# Altium PCB PCB1.PcbDoc (part 1 of 4)
Units mil, origin at the board's own origin, x right, y up, seen from the top; angles counter-clockwise.
Board outline 3912 x 3804 mil, 4 copper layers (Top Layer, Layer 2, Layer 3, Bottom Layer), stack 23.756 mil thick; 248 components, 329 nets, 1182 pads, 457 vias.
Unrouted connection lines stored in the file: 4.
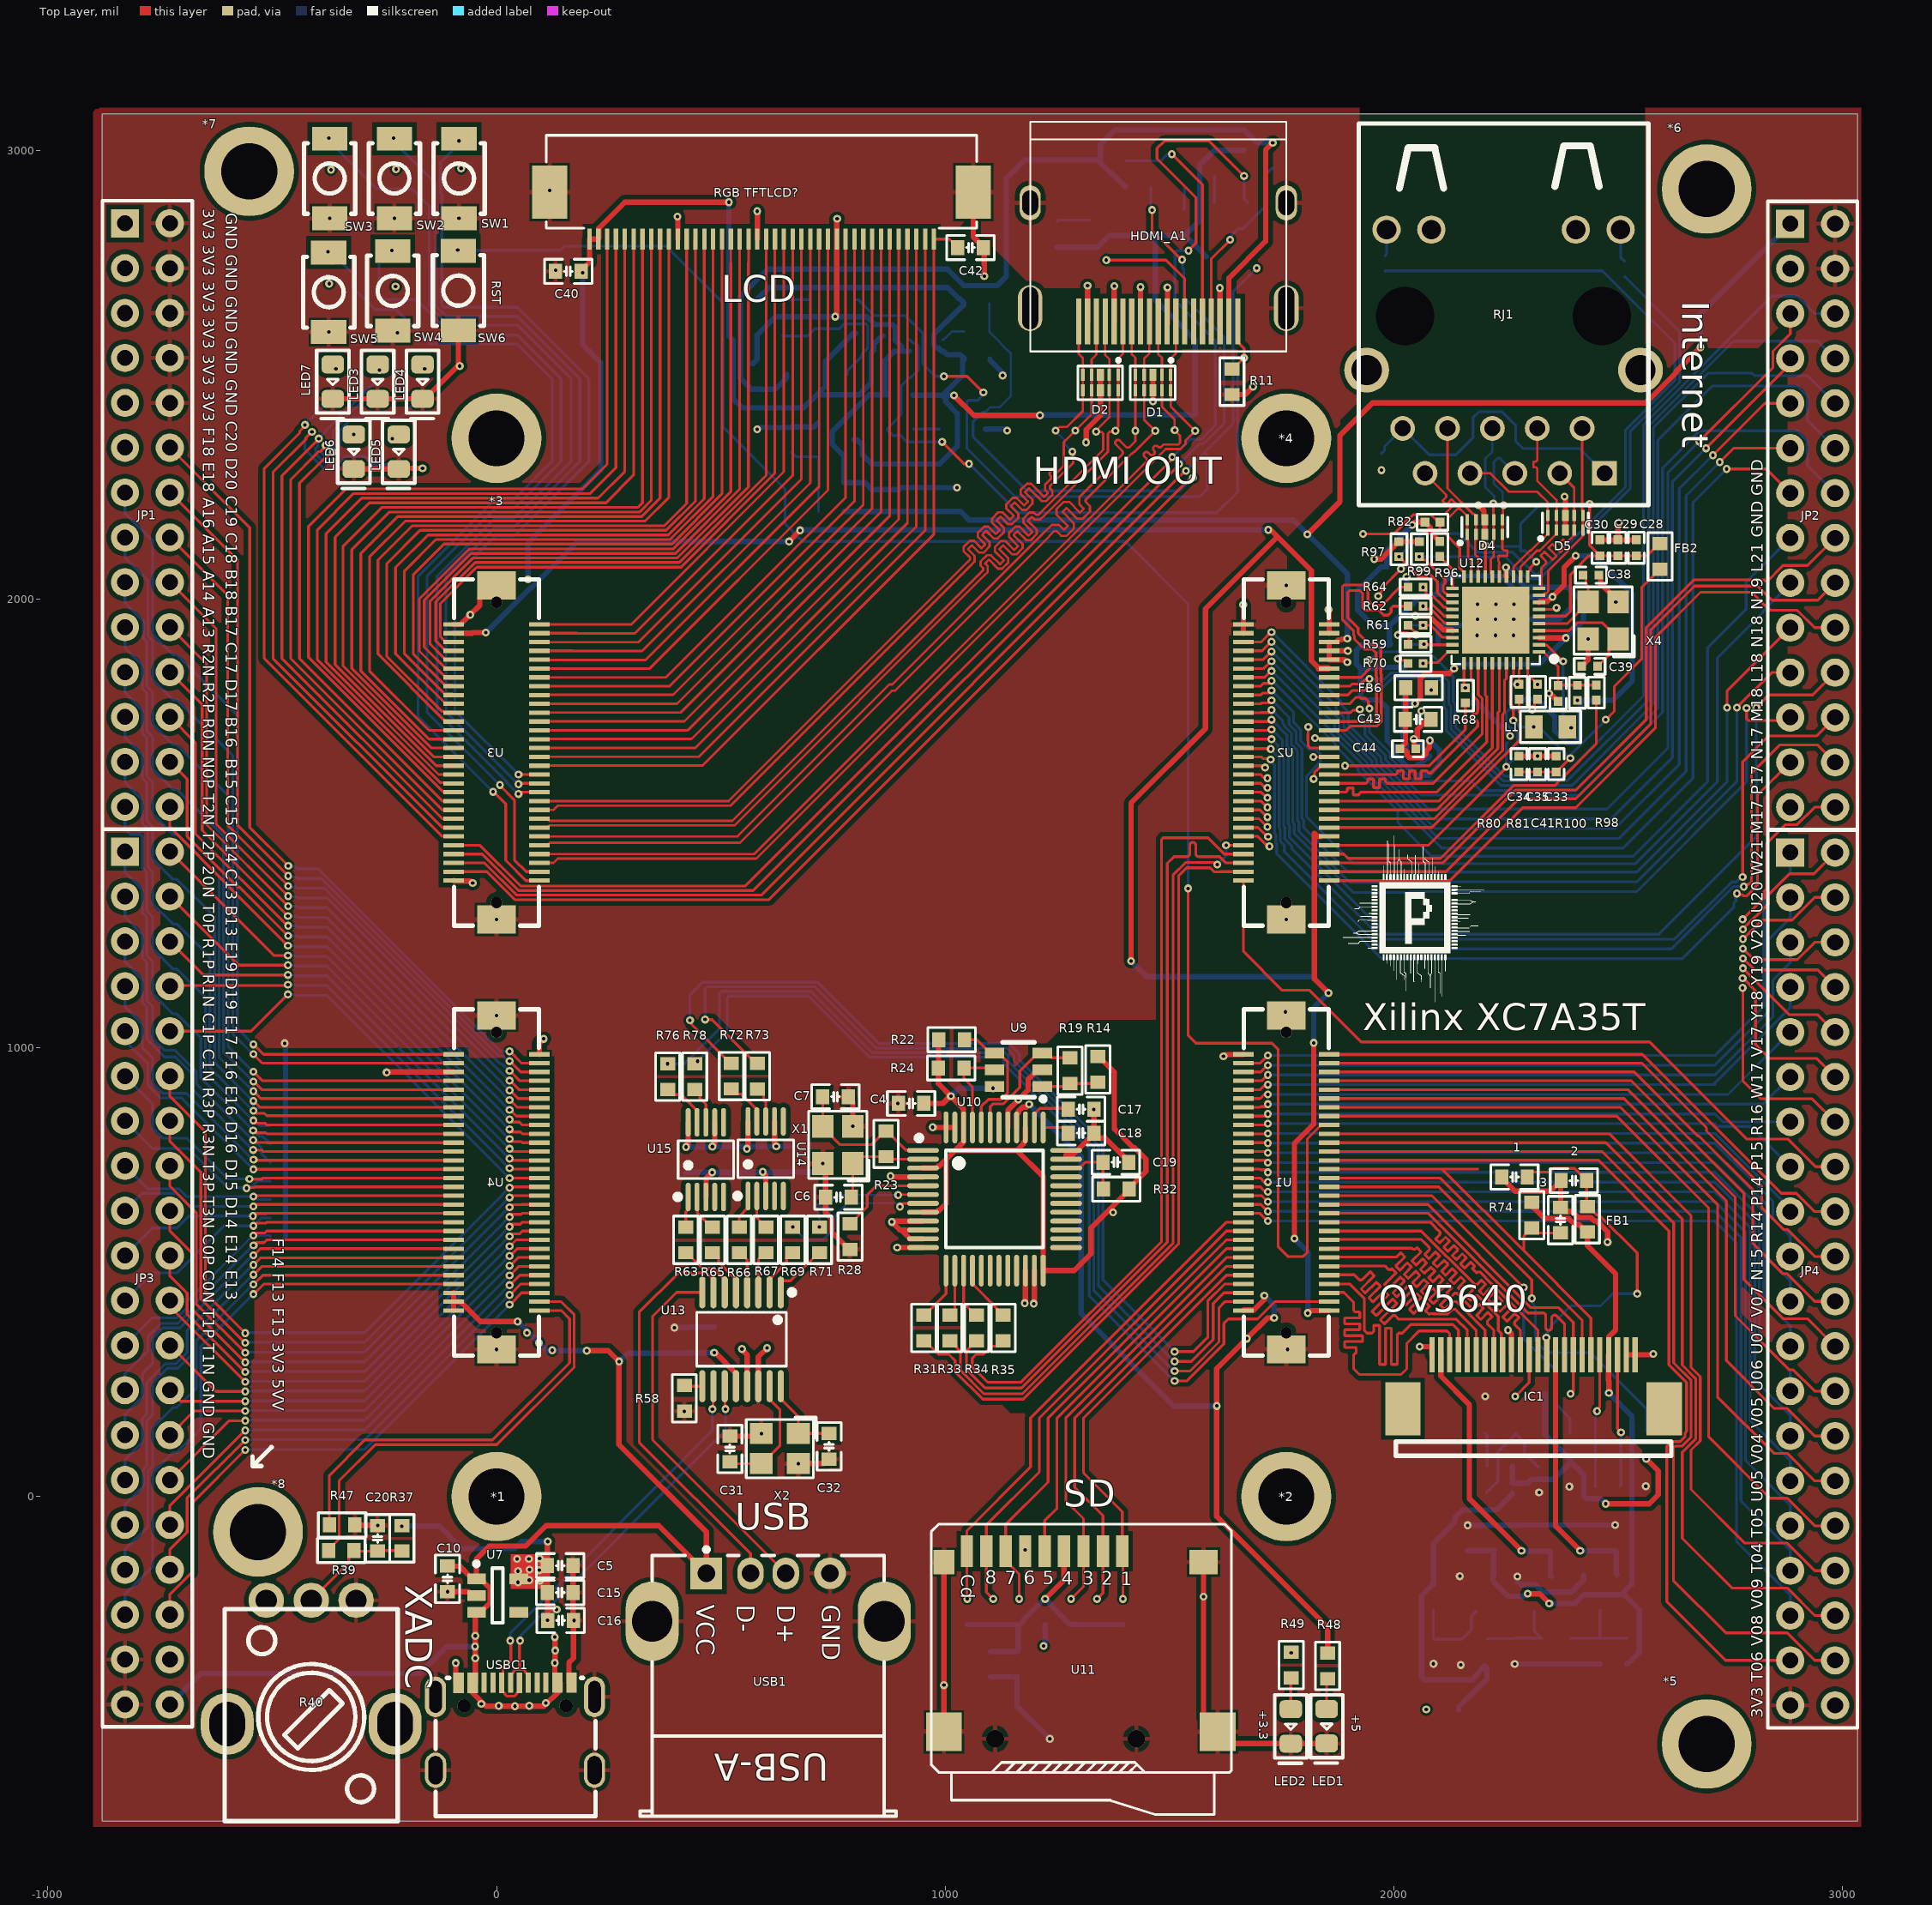
[diagram p0: Top Layer view]
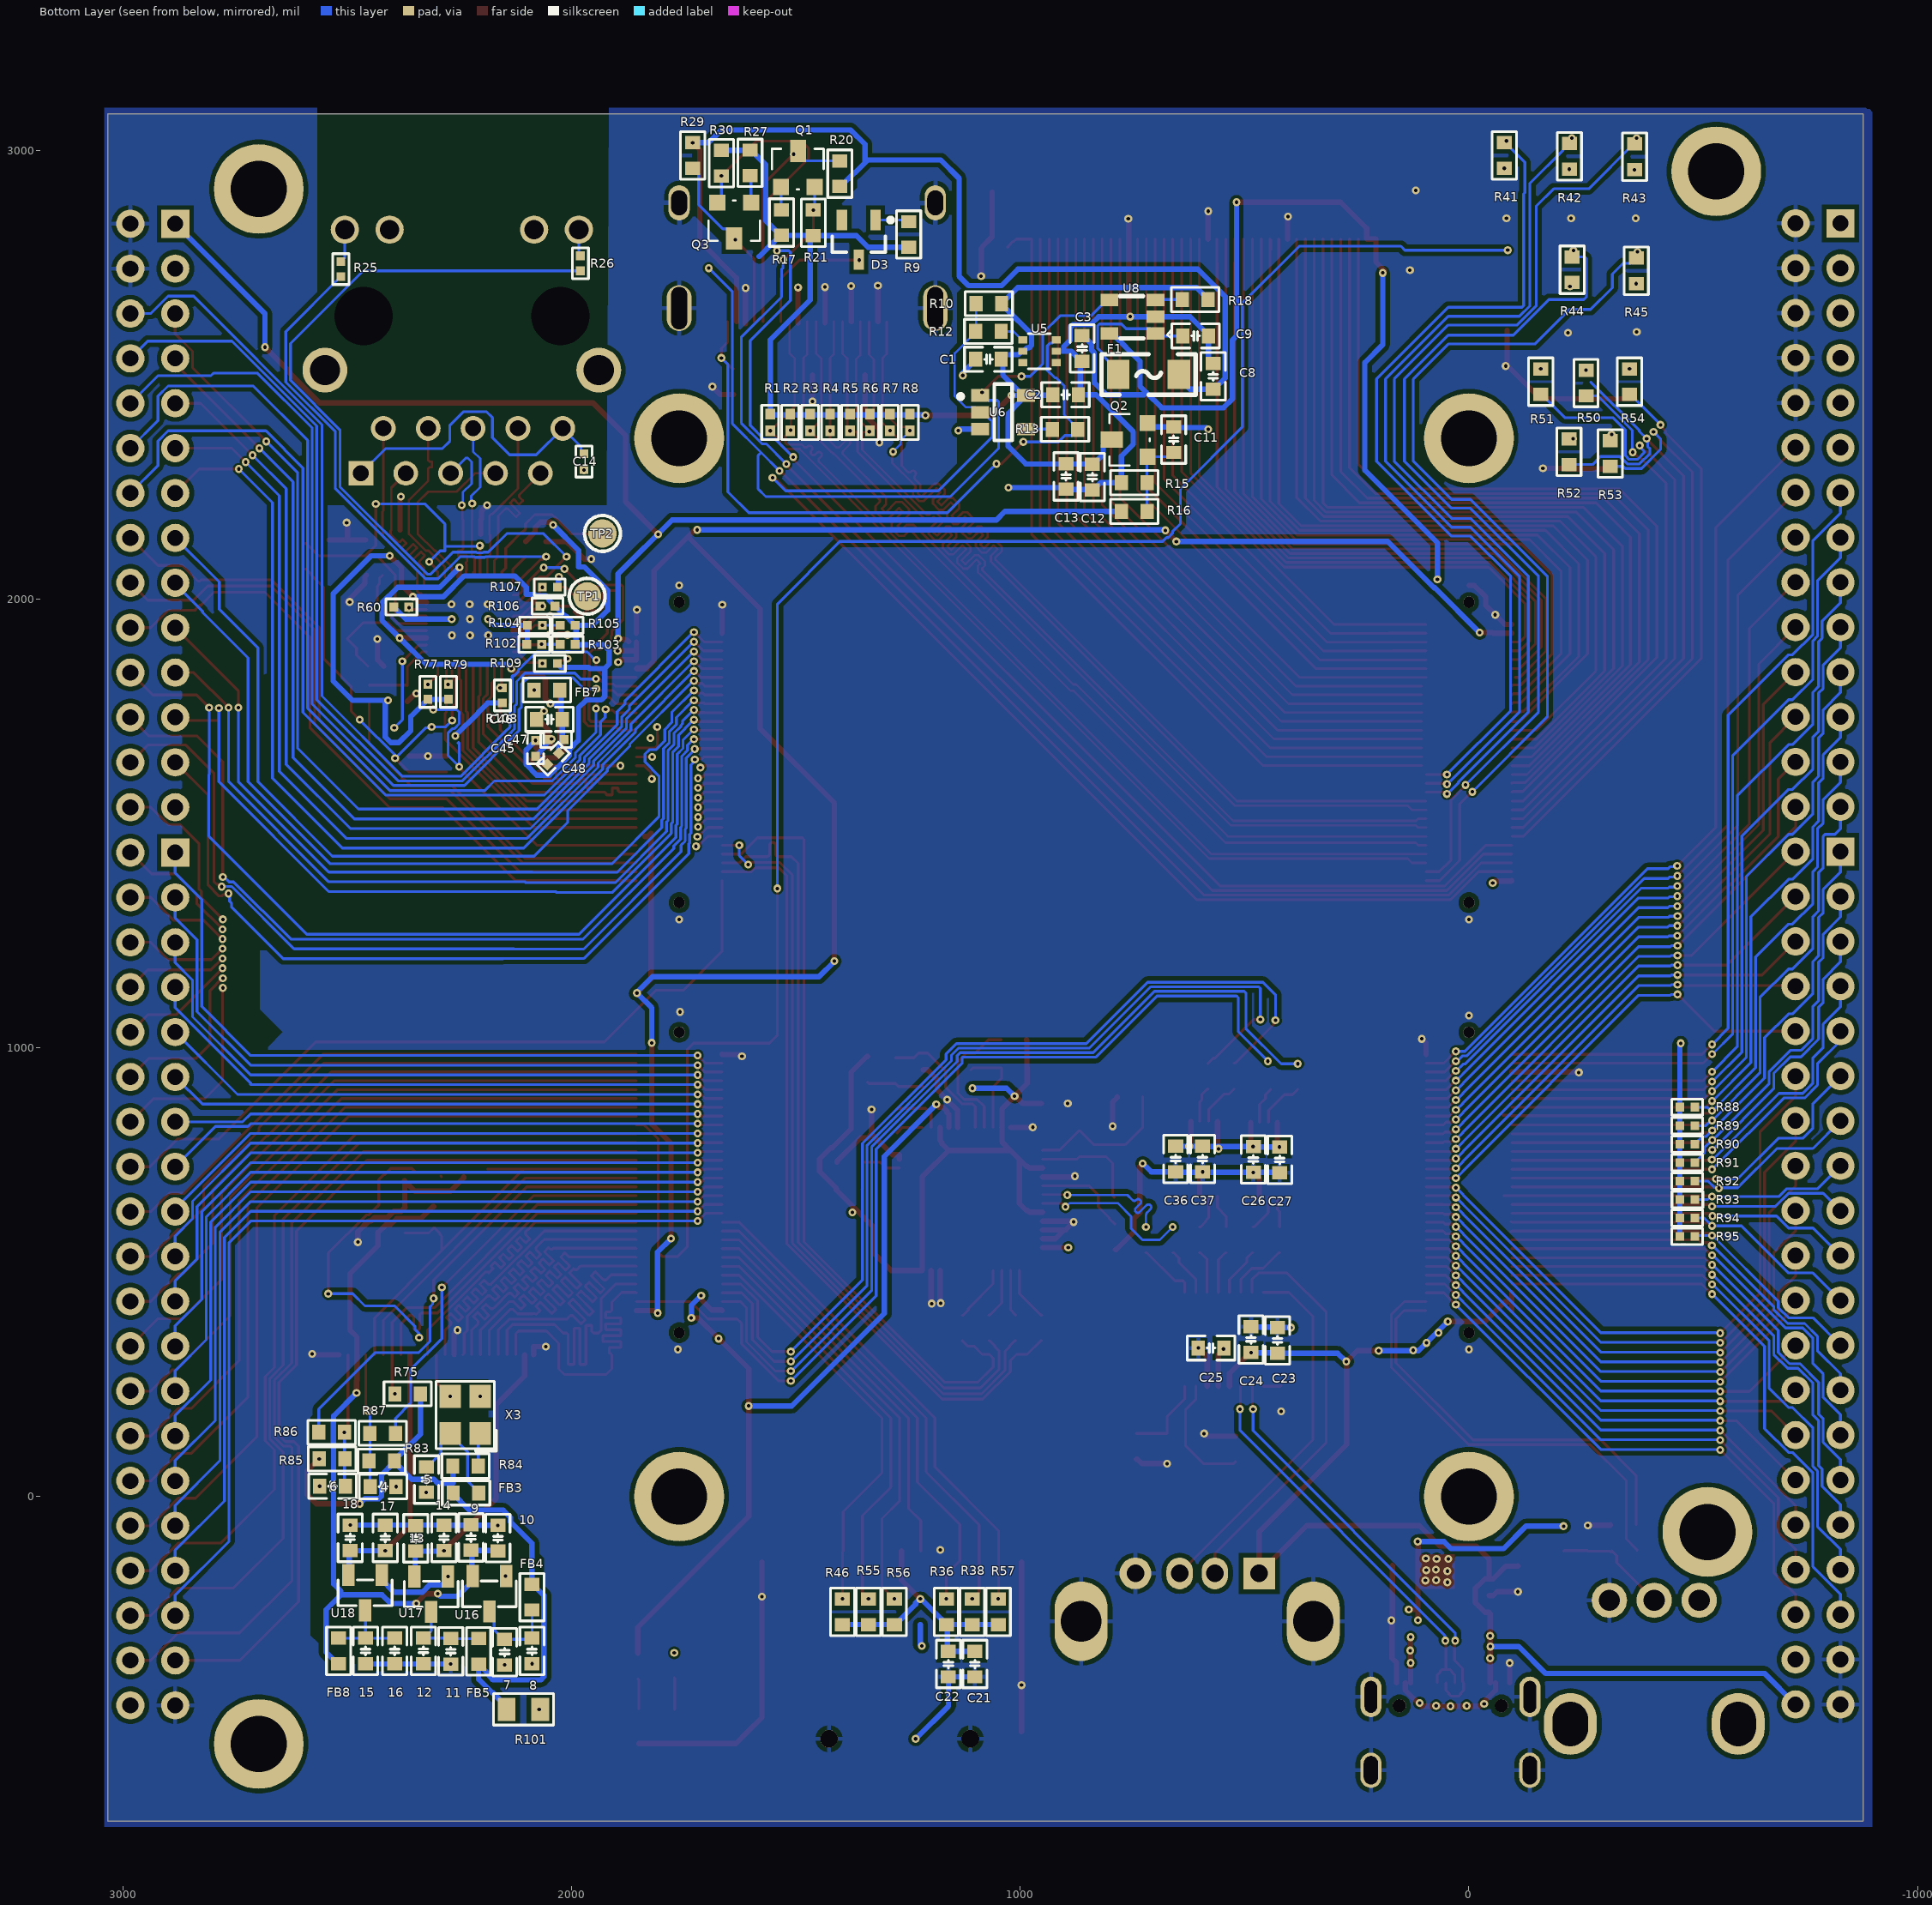
[diagram p1: Bottom Layer view, seen from below]
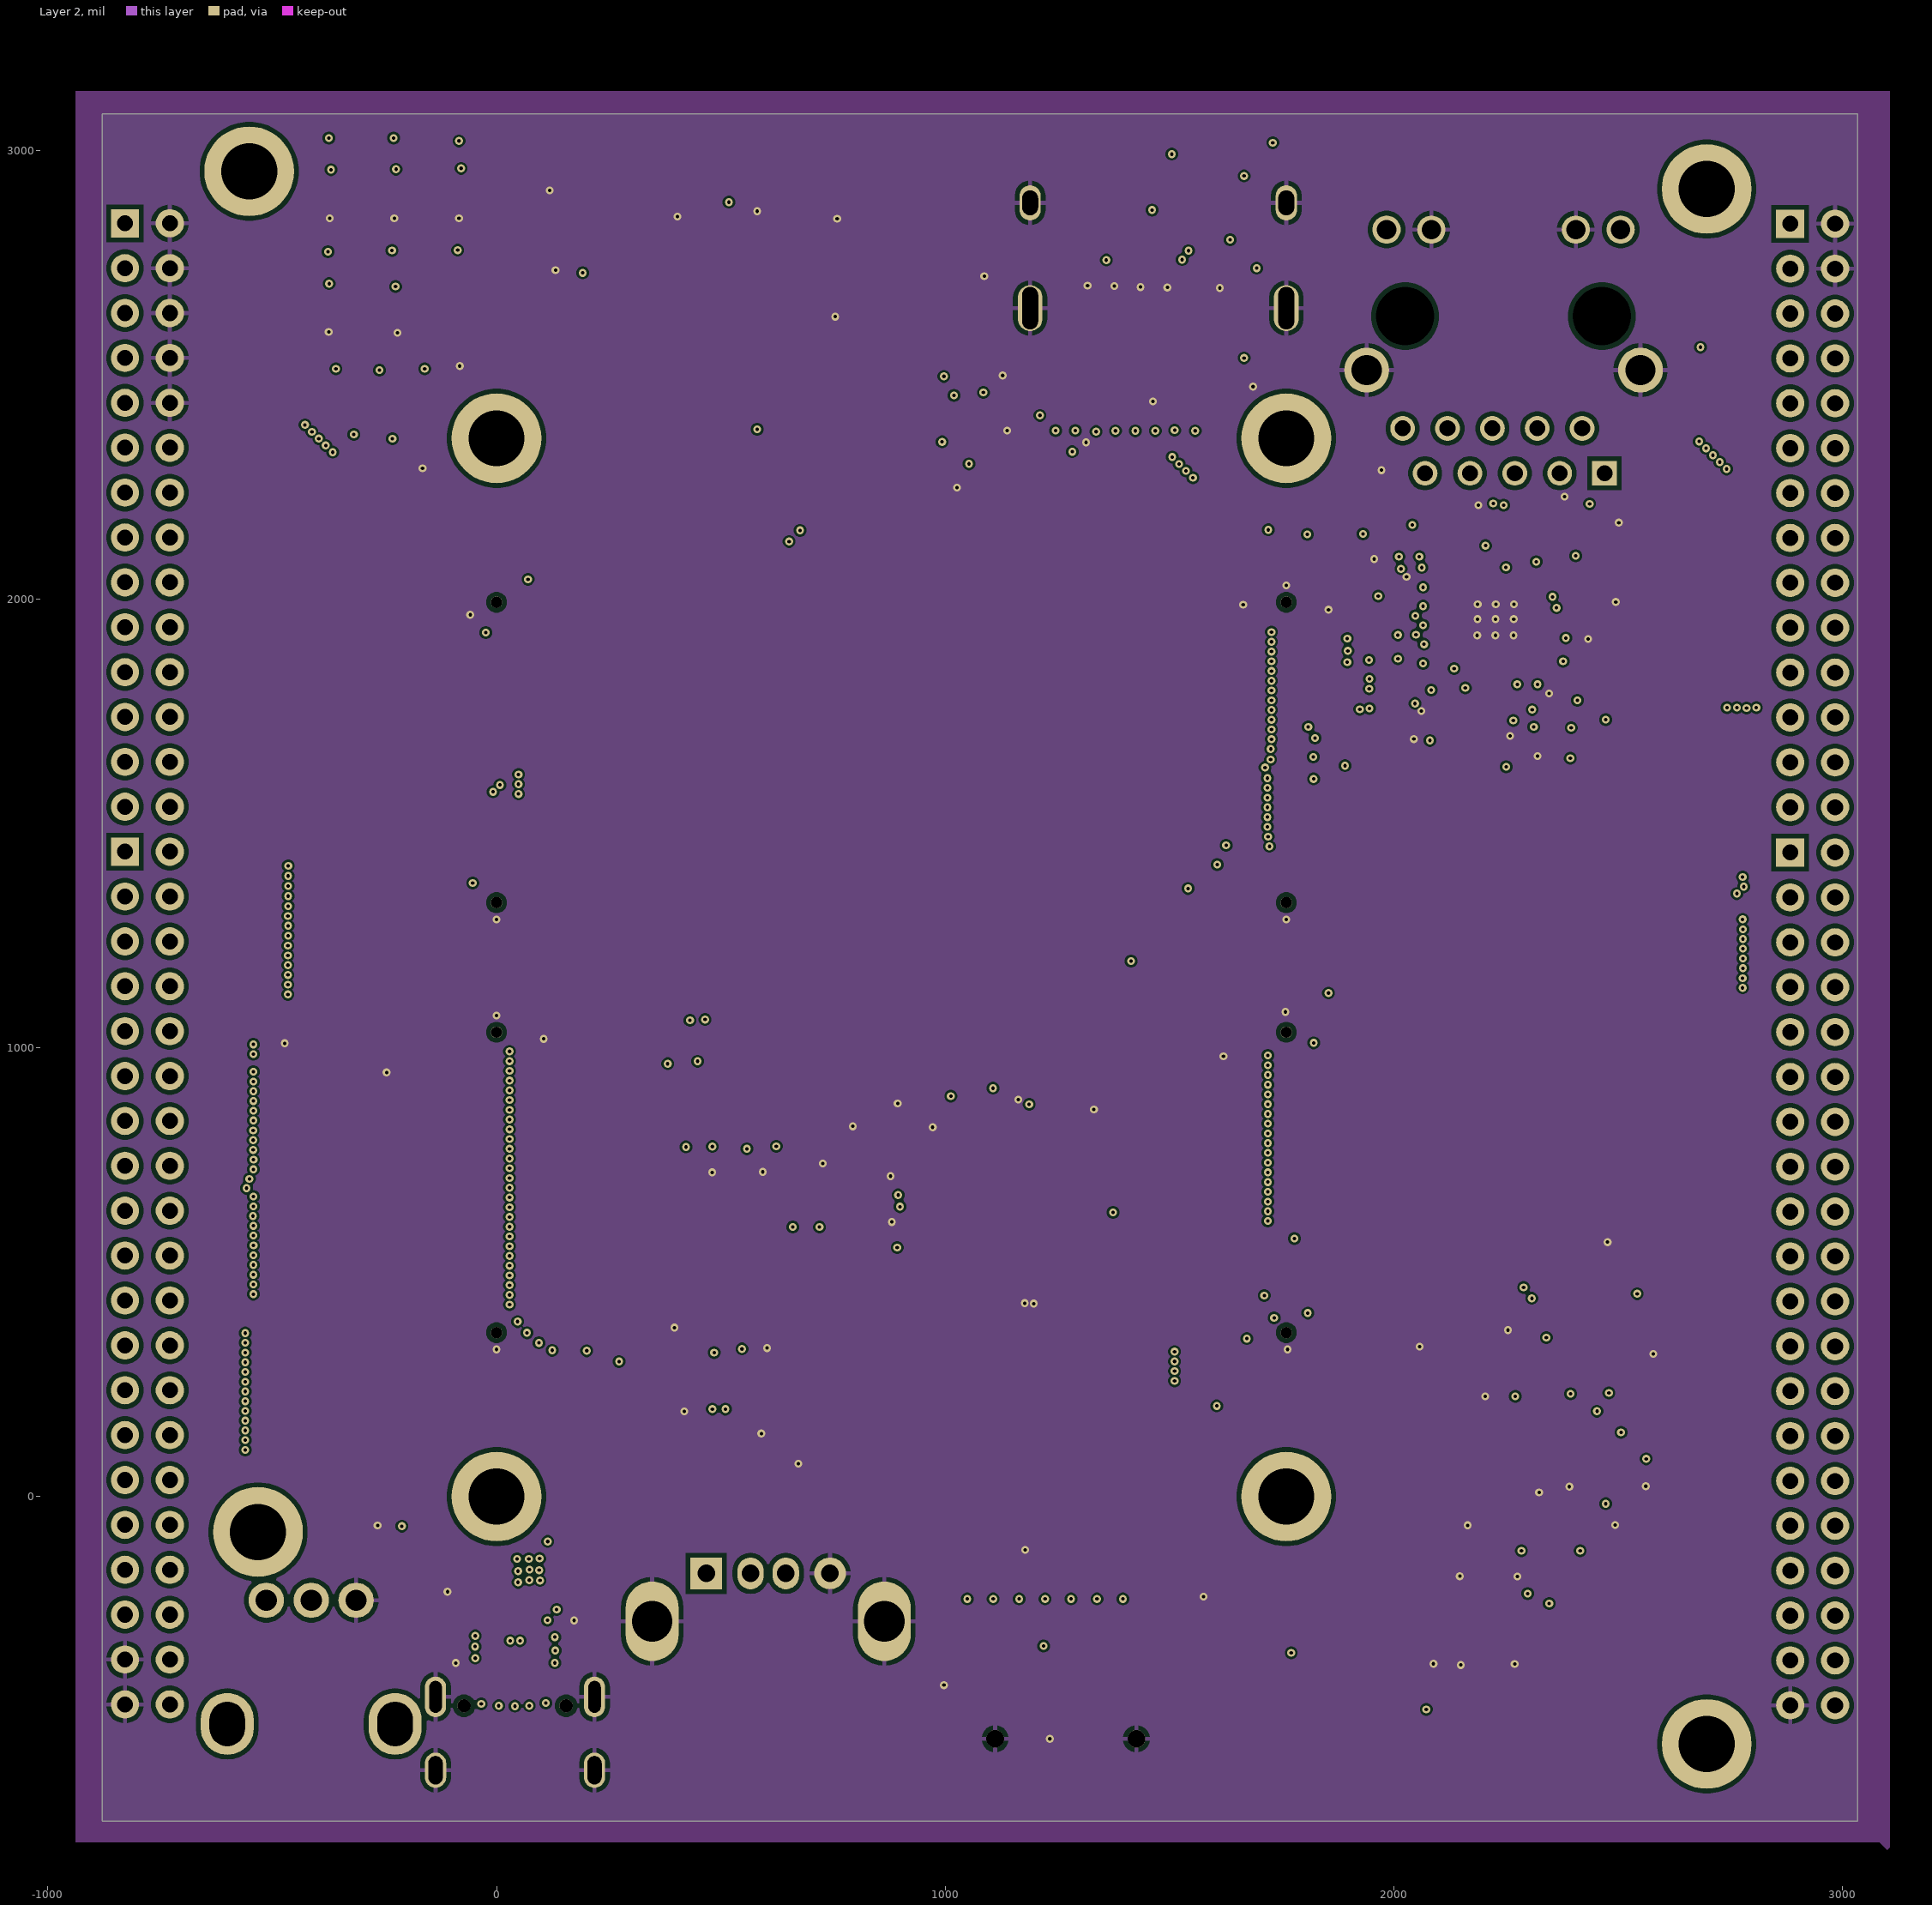
[diagram p2: Layer 2]
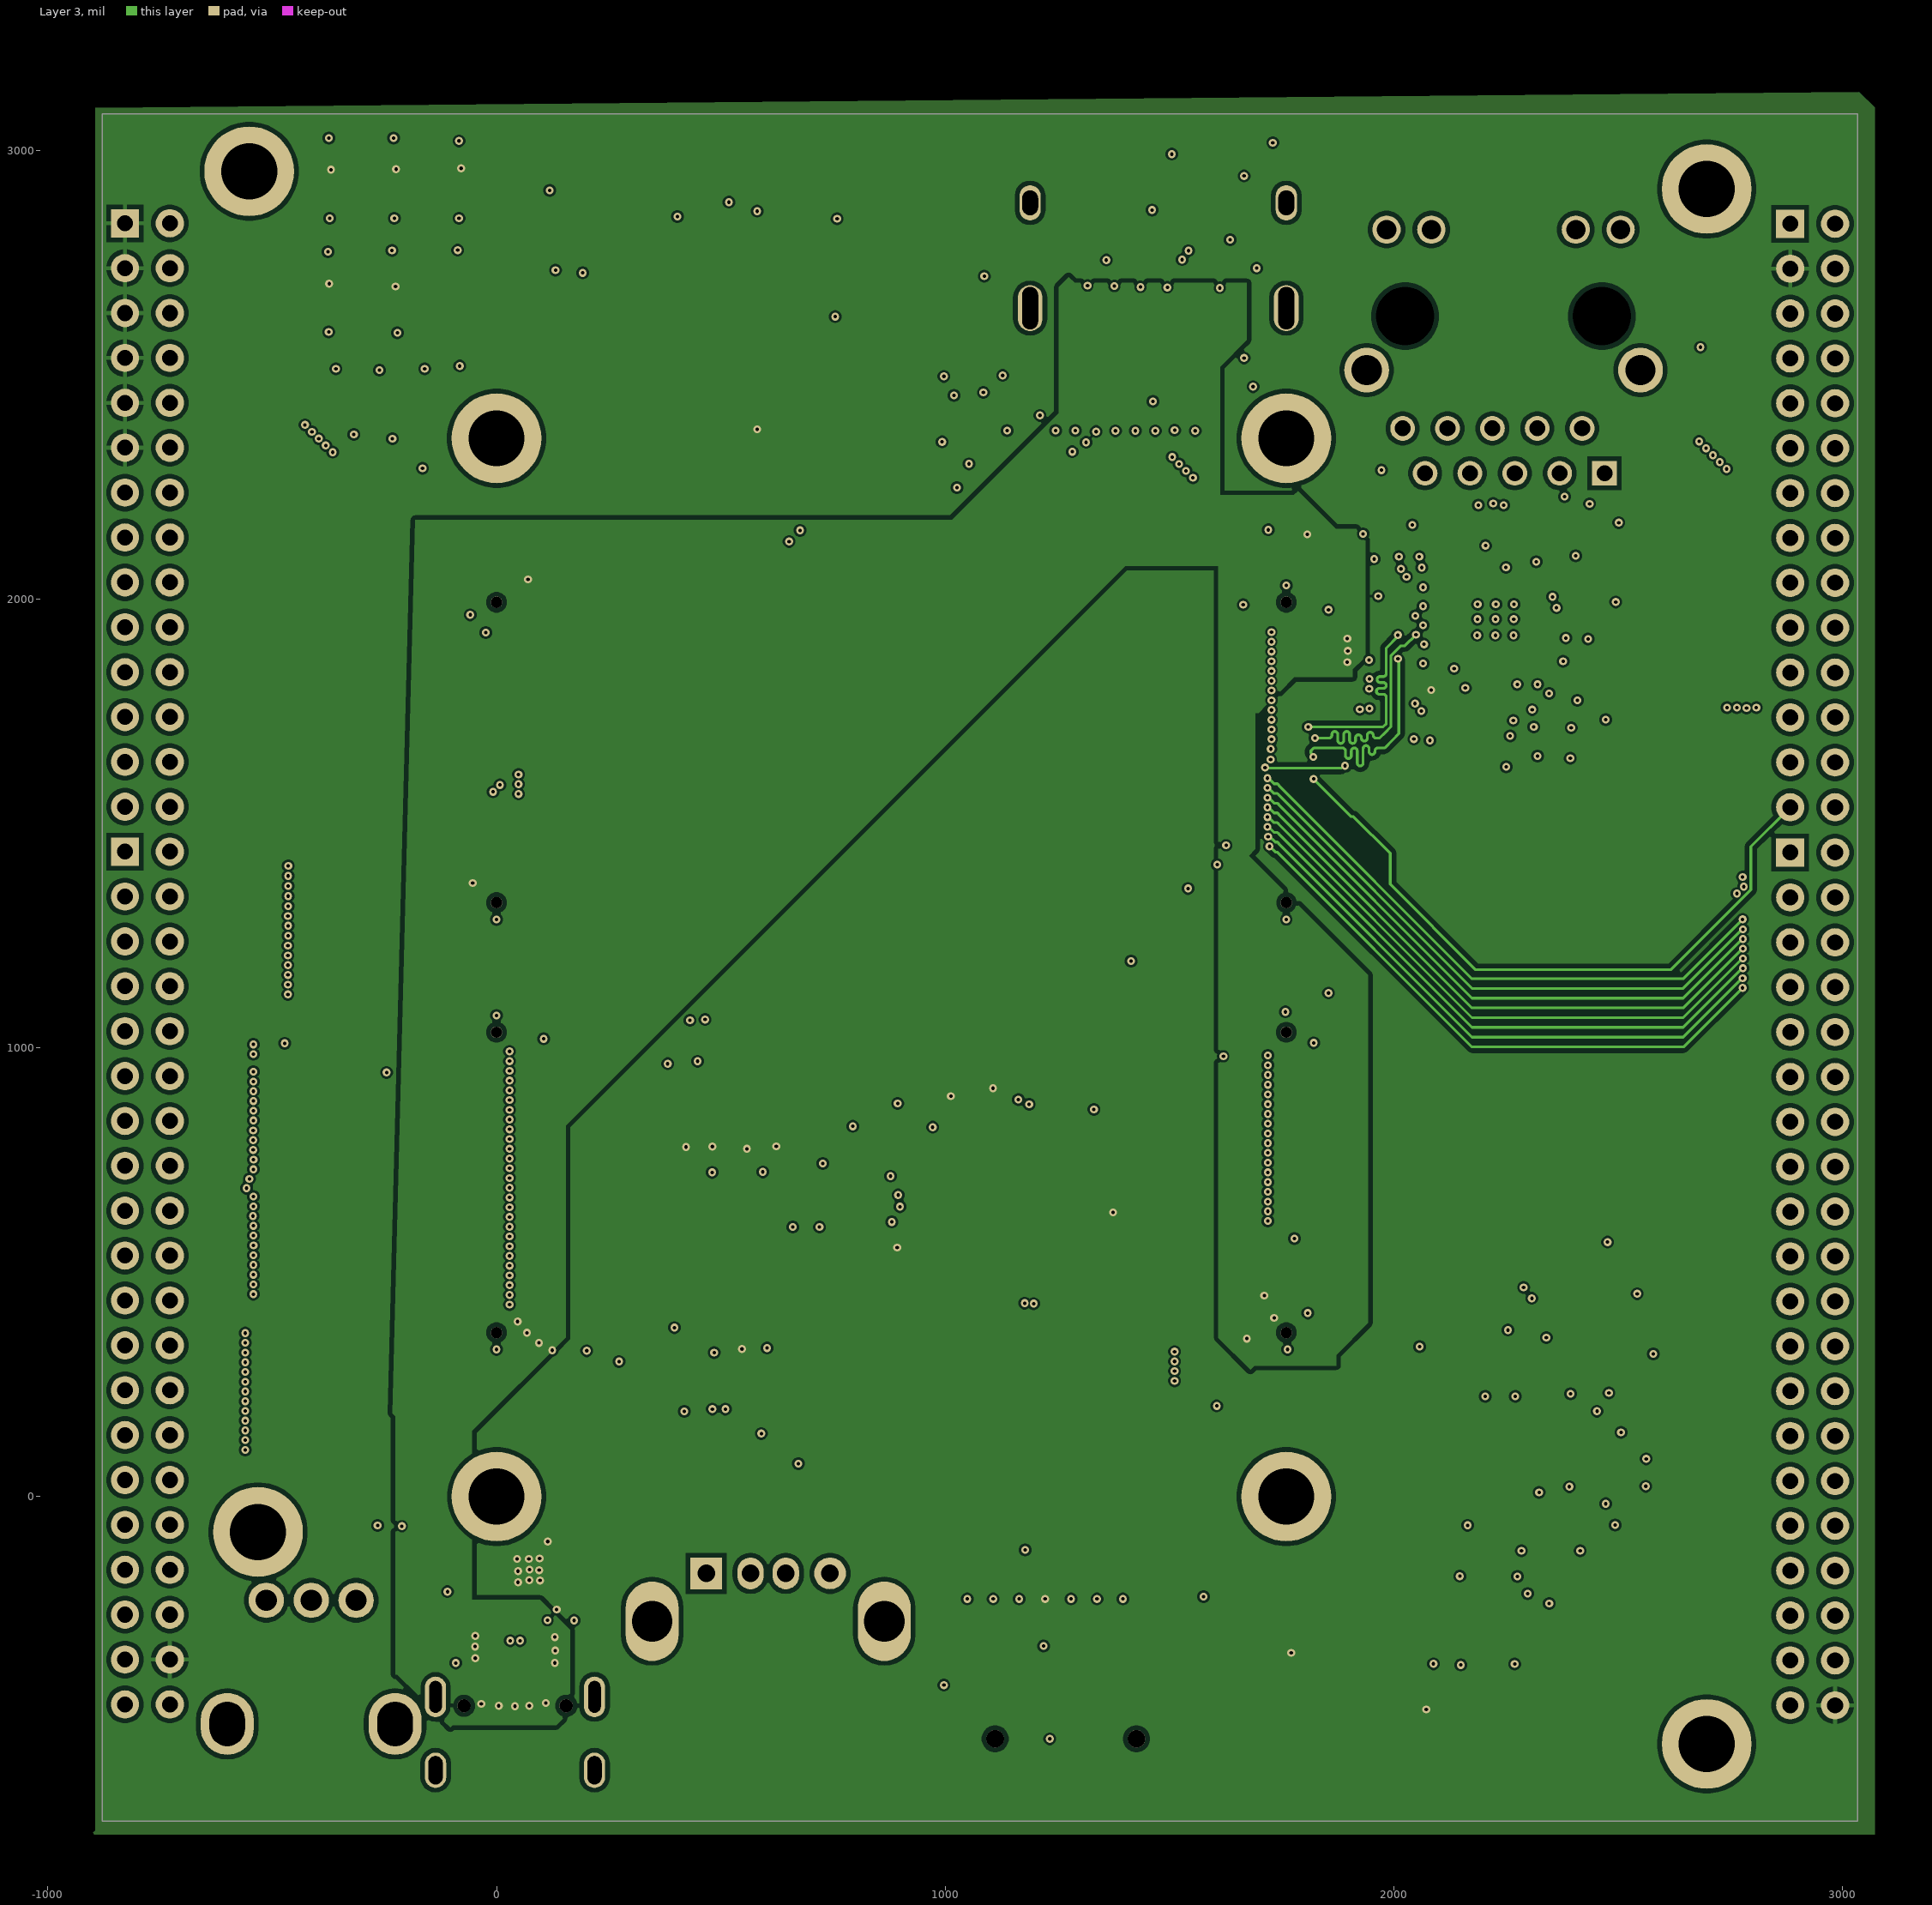
[diagram p3: Layer 3]

## Layer stack, top to bottom
Top Solder: solder mask 0.4, Solder Resist, Dk 3.5
Top Layer: signal copper 1.4
Dielectric 4: prepreg 2.8, PP-006, Dk 4.1
Layer 2: signal copper 1.378
Dielectric 1: dielectric 12.6, FR-4, Dk 4.8
Layer 3: signal copper 1.378
Dielectric 5: prepreg 2.8, PP-006, Dk 4.1
Bottom Layer: signal copper 1.4
Bottom Solder: solder mask 0.4, Solder Resist, Dk 3.5

## Board outline
-879,-723 -879,3081 3033,3081 3033,-723

## Design rules (kind name [scope] priority, off if disabled: settings)
Clearance via_poly [IsVia vs InPoly] p1: gap=5 ignorepadtopadclearanceinfootprint=FALSE
Clearance poly [InPoly] p2: gap=10 ignorepadtopadclearanceinfootprint=FALSE
Clearance Clearance_all [All] p3: gap=4 ignorepadtopadclearanceinfootprint=FALSE
DiffPairsRouting 100ohm_diff [All] p1: maxlimit=15 minlimit=5 mostfreqgap=10 toplayer_minwidth=5.24 toplayer_maxwidth=5.24 toplayer_prefwidth=5.24 midlayer1_minwidth=4.77 midlayer1_maxwidth=4.77 midlayer1_prefwidth=4.77 midlayer2_minwidth=4.77 midlayer2_maxwidth=4.77 midlayer2_prefwidth=4.77 bottomlayer_minwidth=5.24 bottomlayer_maxwidth=5.24 bottomlayer_prefwidth=5.24 maxuncoupledlength=200
PlaneClearance [All] p1: clearance=7
PlaneConnect [All] p1: planeconnectstyle=Direct reliefexpansion=20 reliefentries=4 reliefconductorwidth=10 reliefairgap=10
PolygonConnect [All] p1: thpad.connectstyle=Relief thpad.reliefconductorwidth=10 thpad.reliefentries=4 thpad.polygonreliefangle="90 Angle" thpad.airgapwidth=10 smdpad.connectstyle=Relief smdpad.reliefconductorwidth=10 smdpad.reliefentries=4 smdpad.polygonreliefangle="90 Angle" smdpad.airgapwidth=5 via.connectstyle=Direct via.reliefconductorwidth=10 via.reliefentries=4 via.polygonreliefangle="90 Angle" via.airgapwidth=10
RoutingVias [All] p1: holewidth=7.9 width=17.7 viastyle="Through Hole" minholewidth=7.9 minwidth=17.7 maxholewidth=7.9 maxwidth=17.7
SolderMaskExpansion [All] p1: expansion=4 istentingtop=FALSE
Width power [InNetClass('power')] p1: maxlimit=14 minlimit=10 preferedwidth=12
Width [All] p2: maxlimit=14 minlimit=5 preferedwidth=6.16
27 further rules are at their usual default settings.

## Classes and differential pairs
net class CMOS: B34_N_L1 B34_N_L5 B34_N_L7 B34_N_L8 B34_N_L9 B34_N_L11 B34_P_L5 B34_P_L7 B34_P_L8 B34_P_L10 B34_P_L20
net class RGMII: B14_N_L5 B14_N_L6 B14_N_L8 B14_N_L9 B14_N_L14 B14_N_L18 B14_N_L20 B14_P_L5 B14_P_L8 B14_P_L12 B14_P_L14 B14_P_L18
differential pair class PHY: PHY2_MDI0 PHY2_MDI1 PHY2_MDI2 PHY2_MDI3
differential pair class HDMI: HDMI_CLK HDMI_D0 HDMI_D1 HDMI_D2
net class jtag: FPGA_TCK FPGA_TDI FPGA_TDO FPGA_TMS
net class power: +1.5_ov +2.8_ov +3.3 +3.3_AVDD_GMII +3.3_board +3.3_DVDD_GMII +3.3_hdmi +3.3_ov +5 +5_hdmi AF-2.8V_ov GND
differential pair PHY2_MDI3: +PHY2_MDI3N -PHY2_MDI3P
differential pair PHY2_MDI2: +PHY2_MDI2P -PHY2_MDI2N
differential pair PHY2_MDI1: +PHY2_MDI1P -PHY2_MDI1N
differential pair PHY2_MDI0: +PHY2_MDI0P -PHY2_MDI0N
differential pair JTAG: +JTAG_DP -JTAG_DM
differential pair HDMI_CLK: +B16_P_L20 -B16_N_L20
differential pair HDMI_D0: +B16_N_L23 -B16_P_L23
differential pair HDMI_D1: +B16_P_L22 -B16_N_L22
differential pair HDMI_D2: +B16_N_L18 -B16_P_L18

## Components (designator, comment, footprint, x,y, rotation, side; value= is the part's Value field where it differs from the comment)
1 "0.1UF" C0603_L 2268.46,712 r0 top
2 "10UF" C0603_L 2401,704 r0 top
3 "1UF" C0603_L 2371,616 r270 top
4 "100pF" C0603_L 2419.54,22.13 r0 bottom
5 "1UF" C0603_L 2323,38 r90 bottom
6 "100pF" C0603_L 2532.54,23.13 r180 bottom
7 "0.1UF" C0603_L 2149,-346.54 r90 bottom
8 "10UF" C0603_L 2088,-344 r90 bottom
9 "0.1UF" C0603_L 2224,-91 r270 bottom
10 "10UF" C0603_L 2164,-92.54 r270 bottom
11 "0.1UF" C0603_L 2269,-344.54 r90 bottom
12 "10UF" C0603_L 2330,-343.54 r90 bottom
13 "0.1UF" C0603_L 2347,-93 r270 bottom
14 "10UF" C0603_L 2284,-92 r270 bottom
15 "0.1UF" C0603_L 2459,-344 r90 bottom
16 "10UF" C0603_L 2394,-344 r90 bottom
17 "0.1UF" C0603_L 2415,-92 r270 bottom
18 "10UF" C0603_L 2493,-92 r270 bottom
*1 "M3" "M3 125X200"#1 -50,0 r0 top locked
*2 "M3" "M3 125X200"#2 1336,580 r0 top locked
*3 "M3" "M3 125X200"#3 -56,2358 r0 top locked
*4 "M3" "M3 125X200"#4 2396,-170 r0 top locked
*5 "M3" "M3 125X200"#5 2698,-587 r0 top
*6 "M3" "M3 125X200"#6 2700,2917 r0 top
*7 "M3" "M3 125X200"#7 -555,2948 r0 top
*8 "M3" "M3 125X200"#8 -550.19,-95.63 r0 top
C1 "100nf" C0603_L 1071,2534 r0 bottom
C2 "100nf" C0603_L 899,2455 r0 bottom
C3 "100nf" C0603_L 861.87,2558 r90 bottom
C4 "100nf" C0603_L 924,876 r0 top
C5 "1uf" C0603_L 141.69,-153.87 r180 top
C6 "33pf" C0603_L 762,667 r180 top
C7 "33pf" C0603_L 755.54,891 r0 top
C8 "100nf" C0603_L 569.87,2496 r270 bottom
C9 "10uf" C0603_L 608.87,2586 r0 bottom
C10 "1uf" C0603_L -109.31,-183.32 r90 top
C11 "10nf" C0603_L 658,2355 r270 bottom
C12 "100nf" C0603_L 839,2271.46 r90 bottom
C13 "100nf" C0603_L 898,2273 r90 bottom
C14 "100nf" C0402_L 1972,2306 r270 bottom
C15 "10uf" C0603_L 141.69,-213.87 r180 top
C16 "100nf" C0603_L 142.69,-275.87 r180 top
C17 "100nf" C0603_L 1303,863 r0 top
C18 "100nf" C0603_L 1302.54,810 r0 top
C19 "100nf" C0603_L 1380,745 r180 top
C20 "1nf" C0603_L -265,-93 r90 top
C21 "100nf" C0603_L 1101,-373 r90 bottom
C22 "10uf" C0603_L 1160,-373 r90 bottom
C23 "10uf" C0603_L 426.53,348 r270 bottom
C24 "100nf" C0603_L 485.53,350 r270 bottom
C25 "10uf" C0603_L 574.53,331 r0 bottom
C26 "100nf" C0603_L 480.53,751 r90 bottom
C27 "10uf" C0603_L 421.65,750 r90 bottom
C28 "10uf" C0402_L 2540.13,2114 r270 top
C29 "100nf" C0402_L 2499,2114 r270 top
C30 "100nf" C0402_L 2459.13,2114 r270 top
C31 "33pf" C0603_L 520.07,106.12 r90 top
C32 "33pf" C0603_L 741.07,112.12 r270 top
C33 "10uf" C0402_L 2361.5,1632.12 r270 top
C34 "100nf" C0402_L 2278.5,1632.13 r270 top
C35 "100nf" C0402_L 2320,1632.13 r270 top
C36 "100nf" C0603_L 653.53,752 r90 bottom
C37 "10uf" C0603_L 593.53,752 r90 bottom
C38 "6pf" C0402_L 2439,2053 r180 top
C39 "6pf" C0402_L 2436,1850 r0 top
C40 "100nf" C0603_L 160,2730 r0 top
C41 "100nf" C0402_L 2365.87,1789.43 r90 top
C42 "1uf" C0603_L 1056,2783 r0 top
C43 "10uf" C0603_L 2054,1732 r0 top
C44 "100nf" C0402_L 2031,1666 r0 top
C45 "100nf" C0402_L 2080,1667 r270 bottom
C46 "10uf" C0603_L 2049,1732 r180 bottom
C47 "100nf" C0402_L 2034,1686.87 r180 bottom
C48 "100nf" C0402_L 2041,1644 r135 bottom
D1 "AZ1045-04F.R7G" DFN2510P10E 1505.32,2529.37 r180 top
D2 "AZ1045-04F.R7G" DFN2510P10E 1388.32,2529.37 r180 top
D3 "Diode BAS16" SOT-23_N 1359.69,2800 r270 bottom
D4 "AZ1143-04F_C42377645" DFN-10_L2.5-W1.0-P0.50-BL-A 2200,2155 r0 top
D5 "AZ1143-04F_C42377645" DFN-10_L2.5-W1.0-P0.50-BL-A 2379.56,2164.44 r0 top
F1 "PTS120630V012" "FU 1206" 713.87,2500 r180 bottom
FB1 "SCBG160808U501T" FB0603 2431,618 r90 top
FB2 "120R,2A" FB0603 2593,2095 r270 top
FB3 "SCBG160808U501T" FB0603 2235,8 r180 bottom
FB4 "SCBG160808U501T" FB0603 2088,-224 r90 bottom
FB5 "SCBG160808U501T" FB0603 2207,-345 r270 bottom
FB6 "120R,2A" FB0603 2055,1802 r0 top
FB7 "120R,2A" FB0603 2055,1797 r0 bottom
FB8 "SCBG160808U501T" FB0603 2519,-344 r270 bottom
HDMI_A1 "HDMI" HDMI_SMD_A 1760.06,3063.28 r180 top
IC1 "OV5640" OV2640 2311.09,253.96 r180 top
JP1 "Header 2X11" HDR2.54-LI-2x14P -778,2187 r270 top
JP2 "Header 2X11" HDR2.54-LI-2x14P 2933.07,2186 r270 top
JP3 "Header 2X11" HDR2.54-LI-2x20P -778,487 r270 top
JP4 "Header 2X11" HDR2.54-LI-2x20P 2933.07,485 r270 top
L1 "4.7uH" L0805 2349,1715 r180 top
LED1 "绿色" LED0805_G 1850,-511.6 r270 top
LED2 "绿色" LED0805_G 1770,-512 r270 top
LED3 "绿色" LED0805_G -265,2484.13 r270 top
LED4 "绿色" LED0805_G -165,2484.13 r270 top
LED5 "绿色" LED0805_G -218,2328 r270 top
LED6 "绿色" LED0805_G -318,2328 r270 top
LED7 "绿色" LED0805_G -365,2484.13 r270 top
Q1 "AO3400" SOT23 1533,2918 r180 bottom
Q2 "AO3400" SOT23 716,2317 r90 bottom
Q3 "AO3400" SOT23 1599.79,2883.02 r0 bottom
R1 "49.9" R0402_M 1557,2393.3 r90 bottom
R2 "49.9" R0402_M 1512.57,2393.3 r90 bottom
R3 "49.9" R0402_M 1468.14,2393.3 r90 bottom
R4 "49.9" R0402_M 1423.71,2393.3 r90 bottom
R5 "49.9" R0402_M 1379.29,2393.3 r90 bottom
R6 "49.9" R0402_M 1334.86,2393.3 r90 bottom
R7 "49.9" R0402_M 1290.43,2393.3 r90 bottom
R8 "49.9" R0402_M 1246,2393.3 r90 bottom
R9 "27K" R0603_L 1248.69,2812 r270 bottom
R10 "10k" R0603_L 1070,2658 r180 bottom
R11 "100K" R0603_L 1639,2484 r90 top
R12 "1k" R0603_L 1071,2596 r0 bottom
R13 "1k" R0603_L 900,2378 r180 bottom
R14 "10k" R0603_L 1340,952 r90 top
R15 "100k" R0603_L 746,2259 r180 bottom
R16 "1k" R0603_L 746,2195 r0 bottom
R17 "10k" R0603_L 1532,2838.54 r90 bottom
R18 "1k" R0603_L 610.33,2667 r0 bottom
R19 "10k" R0603_L 1278,949 r270 top
R20 "2.2k" R0603_L 1402,2947.54 r90 bottom
R21 "2.2k" R0603_L 1461,2838 r90 bottom
R22 "10k" R0603_L 1014.46,1018 r0 top
R23 "1M" R0603_L 868,786 r90 top
R24 "10k" R0603_L 1013,955 r0 top
R25 "510" R0402_L 2514,2735 r90 bottom
R26 "510" R0402_L 1980,2748 r90 bottom
R27 "10k" R0603_L 1602,2971.54 r270 bottom
R28 "100" R0603_L 788,579.13 r90 top
R29 "2.2k" R0603_L 1730,2988 r270 bottom
R30 "2.2k" R0603_L 1666,2971 r270 bottom
R31 "100" R0603_L 952.13,376 r90 top
R32 "47k" R0603_L 1381,685 r0 top
R33 "100" R0603_L 1010.13,376 r90 top
R34 "100" R0603_L 1070,376 r90 top
R35 "100" R0603_L 1129,375.46 r90 top
R36 "4.7k" R0603_L 1164.67,-256.54 r270 bottom
R37 "22k" R0603_L -211,-93 r90 top
R38 "4.7k" R0603_L 1106.83,-256.54 r270 bottom
R39 "11K" R0603_L -346,-120 r180 top
R40 "10K" RV09_RV0932 -413,-459.88 r180 top
R41 "10k" R0603_L -79,2988 r270 bottom
R42 "10k" R0603_L -224,2986 r270 bottom
R43 "10k" R0603_L -369,2985 r270 bottom
R44 "10k" R0603_L -230,2733.54 r270 bottom
R45 "10k" R0603_L -373,2731 r270 bottom
R46 "4.7k" R0603_L 1396,-256.54 r270 bottom
R47 "49.9" R0603_L -344,-63 r180 top
R48 "1k" R0603_L 1852,-377.46 r90 top
R49 "1k" R0603_L 1771,-375 r90 top
R50 "1k" R0603_L -261,2481.13 r270 bottom
R51 "1k" R0603_L -160,2484.13 r270 bottom
R52 "1k" R0603_L -223,2328 r270 bottom
R53 "1k" R0603_L -315,2324 r270 bottom
R54 "1k" R0603_L -358,2484.13 r270 bottom
R55 "4.7k" R0603_L 1338.17,-256.54 r270 bottom
R56 "4.7k" R0603_L 1280.33,-256.54 r270 bottom
R57 "4.7k" R0603_L 1049,-256.54 r270 bottom
R58 "2.2k" R0603_L 418.53,219 r90 top
R59 "22" R0402_L 2048.27,1899 r0 top
R60 "2.49k" R0402_L 2379,1982 r0 bottom
R61 "22" R0402_L 2048.01,1941.5 r0 top
R62 "22" R0402_L 2048.27,1984 r0 top
R63 "0" R0603_L 421.73,572 r90 top
R64 "22" R0402_L 2048.27,2026.5 r0 top
R65 "0" R0603_L 481.33,572 r90 top
R66 "0" R0603_L 540.93,572 r90 top
R67 "0" R0603_L 600.53,572 r90 top
R68 "22" R0402_L 2159,1785 r90 top
R69 "0" R0603_L 660.13,572 r90 top
R70 "22" R0402_L 2048.27,1856.5 r0 top
R71 "0" R0603_L 719.73,572 r90 top
R72 "470" R0603_L 523.4,937 r90 top
R73 "470" R0603_L 581.4,936.54 r90 top
R74 "10k" R0603_L 2307,627 r270 top
R75 "10k" R0603_L 2365,229 r180 bottom
R76 "470" R0603_L 381.53,935.87 r90 top
R77 "1.5k" R0402_L 2320,1793 r90 bottom
R78 "470" R0603_L 441.65,935.87 r90 top
R79 "1.5k" R0402_L 2274,1793 r90 bottom
R80 "22" R0402_L 2279,1793 r90 top
R81 "22" R0402_L 2320,1793 r90 top
R82 "4.7k" R0402_L 2086,2171 r0 top
R83 "2.7k" R0603_L 2423,79.13 r180 bottom
R84 "10k" R0603_L 2236,68 r0 bottom
R85 "2.7k" R0603_L 2533.54,84.13 r0 bottom
R86 "39" R0603_L 2534.54,143.13 r0 bottom
R87 "39" R0603_L 2420.54,141.13 r180 bottom
R88 "NC" R0402_L -486.73,867.57 r180 bottom
R89 "NC" R0402_L -486.73,826.43 r180 bottom
R90 "NC" R0402_L -486.73,785.29 r180 bottom
R91 "NC" R0402_L -486.73,744.14 r180 bottom
R92 "NC" R0402_L -486.73,703 r180 bottom
R93 "NC" R0402_L -486.99,661.86 r180 bottom
R94 "NC" R0402_L -486.73,620.71 r180 bottom
R95 "NC" R0402_L -486.73,579.57 r180 bottom
R96 "10k" R0402_L 2102,2111.27 r90 top
R97 "10k" R0402_L 2011,2111 r90 top
R98 "0" R0402_L 2450.87,1791.43 r90 top
R99 "10k" R0402_L 2056.5,2111 r90 top
R100 "10k/NC" R0402_L 2408.87,1791 r90 top
R101 "0" R0805_L 2107,-474 r0 bottom
R102 "4.7k" R0402_L 2082.82,1899 r180 bottom
R103 "NC" R0402_L 2008.69,1899 r180 bottom
R104 "4.7k" R0402_L 2081.44,1941.5 r180 bottom
R105 "4.7k" R0402_L 2008.44,1941.5 r180 bottom
R106 "4.7k" R0402_L 2053.27,1984 r180 bottom
R107 "4.7k" R0402_L 2048.27,2026.5 r180 bottom
R108 "4.7k" R0402_L 2154,1785 r270 bottom
R109 "4.7k" R0402_L 2048.27,1856.5 r0 bottom
"RGB TFTLCD?" "RGBLCD" FPC-TOP40 207.13,2798 r0 top
RJ1 "HR911130A" HR911130C_RJ45 2244.29,2630 r180 top
SW1 "GT-TC029B-H020-L1N" SW-SMD_L3.9-W2.9-P4.15-LS5.0 -83.57,2936.84 r90 top
SW2 "GT-TC029B-H020-L1N" SW-SMD_L3.9-W2.9-P4.15-LS5.0 -227.74,2936.84 r90 top
SW3 "GT-TC029B-H020-L1N" SW-SMD_L3.9-W2.9-P4.15-LS5.0 -371.91,2936.84 r90 top
SW4 "GT-TC029B-H020-L1N" SW-SMD_L3.9-W2.9-P4.15-LS5.0 -231.39,2686.38 r90 top
SW5 "GT-TC029B-H020-L1N" SW-SMD_L3.9-W2.9-P4.15-LS5.0 -374,2683.41 r90 top
SW6 "GT-TC029B-H020-L1N" SW-SMD_L3.9-W2.9-P4.15-LS5.0 -85,2687 r90 top
TP1 "TEST" "TEST 1.6" 1965,2006 r90 bottom
TP2 "TEST" "TEST 1.6" 1931,2146 r270 bottom
U1 "BTB0.5-60F-2.0G" CONN-SMD_60P-P0.50_BTB0.5-60F-2.0G 1760,700 r90 top locked
U2 "BTB0.5-60F-2.0G" CONN-SMD_60P-P0.50_BTB0.5-60F-2.0G 1760,1658 r90 top locked
U3 "BTB0.5-60F-2.0G" CONN-SMD_60P-P0.50_BTB0.5-60F-2.0G 0,1658 r90 top locked
U4 "BTB0.5-60F-2.0G" CONN-SMD_60P-P0.50_BTB0.5-60F-2.0G 0,700 r90 top locked
U5 "NC7WZ07P6X" NC7WZ07P6X 957,2552 r90 bottom
U6 "NC7SZ125M5X" NC7SZ125M5X 1038,2416 r270 bottom
U7 "ME6211C33M5G" SOT-23-5 2.45,-220.46 r0 top
U8 "TPS2051BDBV" TPS2051BDBV 741.87,2629 r0 bottom
U9 "93LC56BT-I/OT" SOT-23-6_L2.9-W1.6-P0.95-LS2.8-BR 1163.15,949.01 r0 top
U10 "FT232HL" LQFP-48_L7.0-W7.0-P0.50-LS9.0-TL 1108.37,663.12 r0 top
U11 "Micro SD" "Micro SD" 997,-523.95 r0 top
U12 "YT8511C/H" "QFN40 5X5_N" 2227,1953 r90 top
U13 "HUB2.0FE8.1" SSOP-16_L4.9-W3.9-P0.64-LS6.0-BL 18550.44,-13133.64 r180 top
U14 "CH340E" MSOP-10_L3.0-W3.0-P0.50-LS5.0-BL -17393.66,14246.8 r0 top
U15 "CH340E" MSOP-10_L3.0-W3.0-P0.50-LS5.0-BL -17526.97,14244.8 r0 top
U16 "LN6206P282MR-G" SOT-23-3_L2.9-W1.3-P1.90-LS2.4-BR 18780,-17169.25 r90 bottom
U17 "LN6206P282MR-G" SOT-23-3_L2.9-W1.3-P1.90-LS2.4-BR 18909.6,-17169.99 r90 bottom
U18 "LN6206P152MR-G" SOT-23-3_L2.9-W1.3-P1.90-LS2.4-BR 19056.91,-17166.64 r90 bottom
USB1 "USB" USB2.0_Type-A_DIP_F_1 605.37,-171 r270 top
USBC1 "TYPE-C 2.0 -16P" USB-C-SMD_16P 41.21,-512.19 r180 top
X1 "26M" XTAL-3225-4P 760.46,783.66 r90 top
X2 "12M" XTAL-3225-4P 631.45,107 r180 top
X3 "24M" OSC-3225-4P 2237,182 r90 bottom
X4 "25M" XTAL-3225-4P 2465.95,1951.94 r90 top

## Footprints (in the part's own frame and the unit in brackets; to place one, negate y for a bottom-side part, rotate by r counter-clockwise, add the part's x,y. Pads: shape width x height; smd on the part's side, far side on the other; paste and mask are expansions set on the pad)
C0402_L [mm]
  rect 0.5x0.5 smd: 1(-0.45,0) 2(0.45,0)
  silkscreen extent -0.87,-0.46 0.88,0.46, body extent -0.5,-0.25 0.5,0.25, height 0.5
C0603_L [mm]
  rect 0.75x0.85 smd: 1(-0.725,0) 2(0.725,0)
  silkscreen extent -1.35,-0.69 1.35,0.69, body extent -0.8,-0.4 0.8,0.4, height 0.8
CONN-SMD_60P-P0.50_BTB0.5-60F-2.0G [mm]
  rect 0.25x1.15 smd paste+0 mask+0.051: 1(-7.25,2.425) 2(-7.25,-2.425) 3(-6.75,2.425) 4(-6.75,-2.425) 5(-6.25,2.425) 6(-6.25,-2.425) 7(-5.75,2.425) 8(-5.75,-2.425) 9(-5.25,2.425) 10(-5.25,-2.425) 11(-4.75,2.425) 12(-4.75,-2.425) 13(-4.25,2.425) 14(-4.25,-2.425) 15(-3.75,2.425) 16(-3.75,-2.425) 17(-3.25,2.425) 18(-3.25,-2.425) 19(-2.75,2.425) 20(-2.75,-2.425) 21(-2.25,2.425) 22(-2.25,-2.425) 23(-1.75,2.425) 24(-1.75,-2.425) 25(-1.25,2.425) 26(-1.25,-2.425) 27(-0.75,2.425) 28(-0.75,-2.425) 29(-0.25,2.425) 30(-0.25,-2.425) 31(0.25,2.425) 32(0.25,-2.425) 33(0.75,2.425) 34(0.75,-2.425) 35(1.25,2.425) 36(1.25,-2.425) 37(1.75,2.425) 38(1.75,-2.425) 39(2.25,2.425) 40(2.25,-2.425) 41(2.75,2.425) 42(2.75,-2.425) 43(3.25,2.425) 44(3.25,-2.425) 45(3.75,2.425) 46(3.75,-2.425) 47(4.25,2.425) 48(4.25,-2.425) 49(4.75,2.425) 50(4.75,-2.425) 51(5.25,2.425) 52(5.25,-2.425) 53(5.75,2.425) 54(5.75,-2.425) 55(6.25,2.425) 56(6.25,-2.425) 57(6.75,2.425) 58(6.75,-2.425) 59(7.25,2.425) 60(7.25,-2.425)
  rect 1.6x2.2 smd paste+0 mask+0.051: 61(-9.45,0) 62(9.45,0)
  round 0.65 hole 0.65 unplated paste+0: ""(-8.5,0) ""(8.5,0)
  silkscreen extent -9.8,-2.4 9.8,2.4
DFN2510P10E [mm]
  rect 0.2x0.68 smd: 1(0.075,0.771) 2(0.575,0.771) 4(1.575,0.771) 5(2.075,0.771) 6(2.075,1.641) 7(1.575,1.641) 9(0.575,1.641) 10(0.075,1.641)
  rect 0.4x0.68 smd: 3(1.075,0.771) 8(1.075,1.641)
  silkscreen extent -0.18,-0.13 2.36,2.17
DFN-10_L2.5-W1.0-P0.50-BL-A [mm]
  rect 0.2x0.633 smd paste+0 mask+0.051: 1(-0.938,-0.276) 2(-0.438,-0.276) 4(0.562,-0.276) 5(1.062,-0.276) 6(1.062,0.548) 7(0.562,0.548) 9(-0.438,0.548) 10(-0.938,0.548)
  rect 0.4x0.633 smd paste+0 mask+0.051: 3(0.062,-0.276) 8(0.062,0.548)
  silkscreen extent -1.44,-0.86 1.36,0.69
FB0603 [mm]
  rect 0.75x0.85 smd: 1(-0.725,0) 2(0.725,0)
  silkscreen extent -1.35,-0.69 1.35,0.69, body extent -0.8,-0.4 0.8,0.4, height 0.8
FPC-TOP40 [mm]
  rect 0.25x1.2 smd: 1(0,0.102) 2(0.5,0.102) 3(1,0.102) 4(1.5,0.102) 5(2,0.102) 6(2.5,0.102) 7(3,0.102) 8(3.5,0.102) 9(4,0.102) 10(4.5,0.102) 11(5,0.102) 12(5.5,0.102) 13(6,0.102) 14(6.5,0.102) 15(7,0.102) 16(7.5,0.102) 17(8,0.102) 18(8.5,0.102) 19(9,0.102) 20(9.5,0.102) 21(10,0.102) 22(10.5,0.102) 23(11,0.102) 24(11.5,0.102) 25(12,0.102) 26(12.5,0.102) 27(13,0.102) 28(13.5,0.102) 29(14,0.102) 30(14.5,0.102) 31(15,0.102) 32(15.5,0.102) 33(16,0.102) 34(16.5,0.102) 35(17,0.102) 36(17.5,0.102) 37(18,0.102) 38(18.5,0.102) 39(19,0.102) 40(19.5,0.102)
  rect 2x3 smd: A(-2.25,2.754) B(21.725,2.754)
  silkscreen extent -2.45,0.71 21.92,5.97
"FU 1206" [mil]
  rect 50x65 smd: 1(-67.5,0) 2(67.5,0)
  silkscreen extent -105,-45 105,45, body extent -63,-32 63,32, height 34
HDMI_SMD_A [mm]
  rect 0.3x2.6 smd: 1(11.75,11.31) 2(11.25,11.31) 3(10.75,11.31) 4(10.25,11.31) 5(9.75,11.31) 6(9.25,11.31) 7(8.75,11.31) 8(8.25,11.31) 9(7.75,11.31) 10(7.25,11.31) 11(6.75,11.31) 12(6.25,11.31) 13(5.75,11.31) 14(5.25,11.31) 15(4.75,11.31) 16(4.25,11.31) 17(3.75,11.31) 18(3.25,11.31) 19(2.75,11.31)
  oval 1.2x2 hole 0.9 slot 1.4 at 90 deg: 20(0,4.59) 21(14.5,4.59)
  oval 1.4x2.6 hole 0.9 slot 2.4 at 90 deg: 22(0,10.55) 23(14.5,10.55)
  silkscreen extent 0,0 14.5,13
HDR2.54-LI-2x14P [mm]
  rect 1.6x1.6 hole 0.9: 1(-16.51,-1.27)
  round 1.6 hole 0.9: 2(-16.51,1.27) 3(-13.97,-1.27) 4(-13.97,1.27) 5(-11.43,-1.27) 6(-11.43,1.27) 7(-8.89,-1.27) 8(-8.89,1.27) 9(-6.35,-1.27) 10(-6.35,1.27) 11(-3.81,-1.27) 12(-3.81,1.27) 13(-1.27,-1.27) 14(-1.27,1.27) 15(1.27,-1.27) 16(1.27,1.27) 17(3.81,-1.27) 18(3.81,1.27) 19(6.35,-1.27) 20(6.35,1.27) 21(8.89,-1.27) 22(8.89,1.27) 23(11.43,-1.27) 24(11.43,1.27) 25(13.97,-1.27) 26(13.97,1.27) 27(16.51,-1.27) 28(16.51,1.27)
  silkscreen extent -17.78,-2.54 17.78,2.54, body extent -17.78,-2.54 17.78,2.54, height 8.5
HDR2.54-LI-2x20P [mm]
  rect 1.6x1.6 hole 0.9: 1(-24.13,-1.27)
  round 1.6 hole 0.9: 2(-24.13,1.27) 3(-21.59,-1.27) 4(-21.59,1.27) 5(-19.05,-1.27) 6(-19.05,1.27) 7(-16.51,-1.27) 8(-16.51,1.27) 9(-13.97,-1.27) 10(-13.97,1.27) 11(-11.43,-1.27) 12(-11.43,1.27) 13(-8.89,-1.27) 14(-8.89,1.27) 15(-6.35,-1.27) 16(-6.35,1.27) 17(-3.81,-1.27) 18(-3.81,1.27) 19(-1.27,-1.27) 20(-1.27,1.27) 21(1.27,-1.27) 22(1.27,1.27) 23(3.81,-1.27) 24(3.81,1.27) 25(6.35,-1.27) 26(6.35,1.27) 27(8.89,-1.27) 28(8.89,1.27) 29(11.43,-1.27) 30(11.43,1.27) 31(13.97,-1.27) 32(13.97,1.27) 33(16.51,-1.27) 34(16.51,1.27) 35(19.05,-1.27) 36(19.05,1.27) 37(21.59,-1.27) 38(21.59,1.27) 39(24.13,-1.27) 40(24.13,1.27)
  silkscreen extent -25.4,-2.54 25.4,2.54, body extent -25.4,-2.54 25.4,2.54, height 8.5
HR911130C_RJ45 [mm]
  rect 1.4x1.4 hole 0.9: 1(-5.715,8.89)
  round 1.4 hole 0.9: 2(-4.445,6.35) 3(-3.175,8.89) 4(-1.905,6.35) 5(-0.635,8.89) 6(0.635,6.35) 7(1.905,8.89) 8(3.175,6.35) 9(4.445,8.89) 10(5.715,6.35)
  round 1.6 hole 1.1: 11(-6.625,-4.9) 12(-4.09,-4.9) 13(4.09,-4.9) 14(6.625,-4.9)
  round 2.54 hole 1.7: B01(-7.75,3.05) B02(7.75,3.05)
  round 0 hole 3.3 unplated: BO3(-5.57,0) BO4(5.57,0)
  silkscreen extent -8.2,-10.9 8.2,10.7
L0805 [mm]
  rect 1x1.3 smd: 1(-0.95,0) 2(0.95,0)
  silkscreen extent -1.7,-0.89 1.7,0.89, body extent -1,-0.65 1,0.65, height 1.3
LED0805_G [mil]
  rrect50% 40x50 smd: 1(-38.4,0) 2(38.4,0)
  silkscreen extent -70,-36 82,36, body extent -39,-25 39,25, height 32
LQFP-48_L7.0-W7.0-P0.50-LS9.0-TL [mm]
  oval 1.8x0.28 smd paste+0 mask+0.051: 1(-4.012,2.75) 2(-4.012,2.25) 3(-4.012,1.75) 4(-4.012,1.25) 5(-4.012,0.75) 6(-4.012,0.25) 7(-4.012,-0.25) 8(-4.012,-0.75) 9(-4.012,-1.25) 10(-4.012,-1.75) 11(-4.012,-2.25) 12(-4.012,-2.75) 25(4.088,-2.75) 26(4.088,-2.25) 27(4.088,-1.75) 28(4.088,-1.25) 29(4.088,-0.75) 30(4.088,-0.25) 31(4.088,0.25) 32(4.088,0.75) 33(4.088,1.25) 34(4.088,1.75) 35(4.088,2.25) 36(4.088,2.75)
  oval 0.28x1.8 smd paste+0 mask+0.051: 13(-2.712,-4.05) 14(-2.211,-4.05) 15(-1.712,-4.05) 16(-1.211,-4.05) 17(-0.712,-4.05) 18(-0.211,-4.05) 19(0.288,-4.05) 20(0.789,-4.05) 21(1.288,-4.05) 22(1.789,-4.05) 23(2.288,-4.05) 24(2.789,-4.05) 37(2.789,4.05) 38(2.288,4.05) 39(1.789,4.05) 40(1.288,4.05) 41(0.789,4.05) 42(0.288,4.05) 43(-0.211,4.05) 44(-0.712,4.05) 45(-1.211,4.05) 46(-1.712,4.05) 47(-2.211,4.05) 48(-2.712,4.05)
  silkscreen extent -4.39,-2.75 2.79,3.6
"M3 125X200"#1 [mil]
  round 200 hole 125: 1(50,0)
"M3 125X200"#2 [mil]
  round 200 hole 125: 1(424,-580)
"M3 125X200"#3 [mil]
  round 200 hole 125: 1(56,0)
"M3 125X200"#4 [mil]
  round 200 hole 125: 1(-636,2528)
"M3 125X200"#5 [mil]
  round 200 hole 125: 1(-1.15,35.82)
"M3 125X200"#6 [mil]
  round 200 hole 125: 1(-3.15,-3.61)
"M3 125X200"#7 [mil]
  round 200 hole 125: 1(3.82,4.76)
"M3 125X200"#8 [mil]
  round 200 hole 125: 1(18.69,16.89)
"Micro SD" [mm]
  rect 2.032x2.2 smd: 0(0,0) 0(15.5,0)
  rect 1.2x1.4 smd: 0(0,9.6)
  round 1 hole 1 unplated: 0(2.9,-0.4) 0(10.9,-0.4)
  rect 1.6x1.4 smd: 0(14.7,9.6)
  rect 0.7x1.8 smd: 1(10.1,10.227) 2(9,10.227) 3(7.9,10.227) 4(6.8,10.227) 5(5.7,10.227) 6(4.6,10.227) 7(3.5,10.227) 8(2.4,10.227) 9(1.3,10.227)
  silkscreen extent -0.72,-4.68 16.27,11.75, body extent -0.27,-4.63 16,10.57, height 1.8
MSOP-10_L3.0-W3.0-P0.50-LS5.0-BL [mm]
  oval 0.28x1.62 smd paste+0 mask+0.051: 1(456.035,-344.857) 2(456.535,-344.857) 3(457.035,-344.857) 4(457.535,-344.857) 5(458.035,-344.857) 6(458.035,-340.637) 7(457.535,-340.637) 8(457.035,-340.637) 9(456.535,-340.637) 10(456.035,-340.637)
  silkscreen extent 455.29,-345.01 458.61,-341.68
NC7SZ125M5X [mil]
  rect 28x40 smd: 1(-37.4,-51.18) 2(0,-51.18) 3(37.4,-51.18) 4(37.4,51.18) 5(-37.4,51.18)
  silkscreen extent -63,-100 63,20
NC7WZ07P6X [mil]
  rect 16x20 smd: 1(-25.59,-37.4) 2(0,-37.4) 3(25.59,-37.4) 4(25.59,37.4) 5(0,37.4) 6(-25.59,37.4)
  silkscreen extent -39,-25 39,25
OSC-3225-4P [mm]
  rect 1.3x1.2 smd: 1(-1.05,-0.85) 2(1.05,-0.85) 3(1.05,0.85) 4(-1.05,0.85)
  silkscreen extent -2.03,-1.75 1.91,1.65, body extent -1.6,-1.25 1.6,1.25, height 0.7
OV2640 [mm]
  rect 2x3 smd: 0(-7.4,1.476) 0(7.4,1.476)
  rect 0.3x2 smd: 1(-5.746,-1.574) 2(-5.248,-1.576) 3(-4.748,-1.576) 4(-4.248,-1.576) 5(-3.748,-1.576) 6(-3.248,-1.576) 7(-2.748,-1.576) 8(-2.248,-1.576) 9(-1.748,-1.576) 10(-1.248,-1.576) 11(-0.748,-1.576) 12(-0.248,-1.576) 13(0.252,-1.576) 14(0.752,-1.576) 15(1.252,-1.576) 16(1.752,-1.576) 17(2.252,-1.576) 18(2.752,-1.576) 19(3.252,-1.576) 20(3.752,-1.576) 21(4.252,-1.576) 22(4.752,-1.576) 23(5.252,-1.576) 24(5.752,-1.576)
  silkscreen extent -7.8,3.34 7.8,4.13
"QFN40 5X5_N" [mm]
  rect 0.2x0.7 smd mask+0.05: 1(-1.8,-2.45) 2(-1.4,-2.45) 3(-1,-2.45) 4(-0.6,-2.45) 5(-0.2,-2.45) 6(0.2,-2.45) 7(0.6,-2.45) 8(1,-2.45) 9(1.4,-2.45) 10(1.8,-2.45) 21(1.8,2.45) 22(1.4,2.45) 23(1,2.45) 24(0.6,2.45) 25(0.2,2.45) 26(-0.2,2.45) 27(-0.6,2.45) 28(-1,2.45) 29(-1.4,2.45) 30(-1.8,2.45)
  rect 0.7x0.2 smd mask+0.05: 11(2.45,-1.8) 12(2.45,-1.4) 13(2.45,-1) 14(2.45,-0.6) 15(2.45,-0.2) 16(2.45,0.2) 17(2.45,0.6) 18(2.45,1) 19(2.45,1.4) 20(2.45,1.8) 31(-2.45,1.8) 32(-2.45,1.4) 33(-2.45,1) 34(-2.45,0.6) 35(-2.45,0.2) 36(-2.45,-0.2) 37(-2.45,-0.6) 38(-2.45,-1) 39(-2.45,-1.4) 40(-2.45,-1.8)
  rect 3.8x3.8 smd mask+0.05: 41(0,0)
  silkscreen extent -2.5,-3.4 2.5,2.5, body extent -2.5,-2.5 2.5,2.5, height 0.74
R0402_L [mm]
  rect 0.5x0.5 smd: 1(-0.425,0) 2(0.425,0)
  silkscreen extent -0.88,-0.46 0.87,0.46, body extent -0.5,-0.25 0.5,0.25, height 0.3
R0402_M [mm]
  rect 0.6x0.55 smd: 1(-0.475,0) 2(0.475,0)
  silkscreen extent -0.97,-0.48 0.97,0.48, body extent -0.5,-0.25 0.5,0.25, height 0.3
R0603_L [mm]
  rect 0.75x0.85 smd: 1(-0.725,0) 2(0.725,0)
  silkscreen extent -1.35,-0.69 1.35,0.69, body extent -0.8,-0.4 0.8,0.4, height 0.4
R0805_L [mm]
  rect 1x1.3 smd: 1(-0.95,0) 2(0.95,0)
  silkscreen extent -1.7,-0.89 1.7,0.89, body extent -1,-0.62 1,0.63, height 0.5
RV09_RV0932 [mm]
  round 2 hole 1.2 paste+0 mask+0.102: 1(-2.54,-5.813) 2(0,-5.813) 3(2.54,-5.813)
  oval 3x3.5 hole 2 slot 2.5 at 90 deg paste+0 mask+0.102: 4(4.75,1.187) 5(-4.75,1.187)
  silkscreen extent -4.9,-5.31 4.9,6.69
SOT23 [mil]
  rect 36x36 smd: 1(0,0) 2(75,0)
  rect 36x50 smd: 3(38,80)
  silkscreen extent -20,-5 95,85
SOT-23-3_L2.9-W1.3-P1.90-LS2.4-BR [mm]
  rect 1.25x0.7 smd paste+0 mask+0.051: 1(431.596,-422.514) 2(431.596,-420.614) 3(429.597,-421.564)
  silkscreen extent 429.87,-423.09 431.32,-420.04
SOT-23-5 [mm]
  rect 1.05x0.6 smd: 1(-1.2,0.95) 2(-1.2,0) 3(-1.2,-0.95) 4(1.2,-0.95) 5(1.2,0.95)
  silkscreen extent -1.32,-1.55 0.3,1.92, body extent -1.4,-1.5 1.4,1.5, height 1.15
SOT-23-6_L2.9-W1.6-P0.95-LS2.8-BR [mm]
  rect 1.1x0.6 smd paste+0 mask+0.051: 1(1.35,-0.899) 2(1.35,0.051) 3(1.35,1.001) 4(-1.35,1.001) 5(-1.35,0.051) 6(-1.35,-0.899)
  silkscreen extent -0.9,-1.73 1.52,1.6
SOT-23_N [mm]
  rect 1.15x0.6 smd: 1(-1.125,0.95) 2(-1.125,-0.95) 3(1.125,0)
  silkscreen extent -1.25,-1.5 0.7,1.92, body extent -0.7,-1.5 0.7,1.5, height 1.1
SSOP-16_L4.9-W3.9-P0.64-LS6.0-BL [mil]
  oval 14x71.45 smd paste+0 mask+2: 1(17916.92,-13588.69) 2(17941.92,-13588.69) 3(17966.92,-13588.69) 4(17991.92,-13588.69) 5(18016.92,-13588.69) 6(18041.92,-13588.69) 7(18066.92,-13588.69) 8(18091.92,-13588.69) 9(18091.92,-13379.64) 10(18066.92,-13379.64) 11(18041.92,-13379.64) 12(18016.92,-13379.64) 13(17991.92,-13379.64) 14(17966.92,-13379.64) 15(17941.92,-13379.64) 16(17916.92,-13379.64)
  silkscreen extent 17886,-13595 18104,-13424
SW-SMD_L3.9-W2.9-P4.15-LS5.0 [mm]
  rect 1.35x2 smd paste+0 mask+0.051: 1(-2.25,0) 2(2.25,0)
  silkscreen extent -2,-1.45 2,1.45
"TEST 1.6" [mm]
  round 1.6 smd paste-1.6: 1(0,0)
  silkscreen extent -1.02,-1.01 1.02,1.02
TPS2051BDBV [mm]
  rect 1x0.7 smd: 1(-1.104,0.95) 2(-1.104,0) 3(-1.104,-0.95) 4(1.496,-0.95) 5(1.496,0.95)
  silkscreen extent -2,-1.16 0.9,1.23
USB2.0_Type-A_DIP_F_1 [mm]
  rect 1.8x1.8 hole 1: 1(0,-3.5)
  oval 1.8x1.5 hole 1: 2(0,-1) 3(0,1)
  round 1.8 hole 1: 4(0,3.5)
  oval 4.5x3 hole 2.3: 4(2.71,6.57) 4(2.71,-6.57)
  silkscreen extent -1.47,-7.25 13.75,7.25, body extent -0.6,-7.34 13.7,7.34, height 6.8
USB-C-SMD_16P [mm]
  oval 1.2x2.3 hole 0.7 slot 1.8 at 90 deg: 0(-4.5,-1.675) 0(4.5,-1.675)
  oval 1.2x2 hole 0.8 slot 1.6 at 90 deg: 0(-4.5,2.475) 0(4.5,2.475)
  rect 0.3x1.15 smd: A1(3.35,-2.473) A4(2.55,-2.471) A5(1.25,-2.475) A6(0.25,-2.475) A7(-0.25,-2.473) A9(-2.55,-2.475) A12(-3.35,-2.475) B1(-3.05,-2.475) B4(-2.25,-2.475) B5(-1.75,-2.475) B6(-0.75,-2.475) B7(0.75,-2.473) B9(2.25,-2.471) B12(3.05,-2.473)
  rect 0.3x1.148 smd: A8(1.75,-2.475) B8(-1.25,-2.475)
  round 0.75 hole 0.75 unplated: ""(-2.89,-1.175) ""(2.89,-1.175)
  silkscreen extent -4.56,-2.75 4.5,5.08, body extent -4.45,-2.87 4.49,5.03, height 3.25
XTAL-3225-4P [mm]
  rect 1.3x1.2 smd: 1(-1.05,-0.85) 2(1.05,-0.85) 3(1.05,0.85) 4(-1.05,0.85)
  silkscreen extent -2.03,-1.75 1.91,1.65, body extent -1.6,-1.25 1.6,1.25, height 0.7

## Part data
1 2 3 4 5 6 7 8 9 10 11 12 13 14 15 16 17 18 C1 C2 C3 C4 C5 C6 C7 C8 C9 C10 C11 C12 C13 C14 C15 C16 C17 C18 C19 C20 C21 C22 C23 C24 C25 C26 C27 C28 C29 C30 C31 C32 C33 C34 C35 C36 C37 C38 C39 C40 C41 C42 C43 C44 C45 C46 C47 C48: library part C, "贴片电容/MLCC电容"
*1 *2 *3 *4 *5 *6 *7 *8: "铜柱孔"
D3: "Silicon Switching Diode for High-Speed Switching"
FB1 FB2 FB3 FB4 FB5 FB6 FB7 FB8: library part FB, "贴片磁珠"
HDMI_A1: library part HDMI_A
JP1 JP2: library part "Header 14X2", "14*2P接插件"
JP3 JP4: library part "Header 20X2", "20*2P接插件"
L1: library part L, "贴片小功率电感"
LED1 LED2 LED3 LED4 LED5 LED6 LED7: library part LED, "贴片LED"
R1 R2 R3 R4 R5 R6 R7 R8 R9 R10 R11 R12 R13 R14 R15 R16 R17 R18 R19 R20 R21 R22 R23 R24 R25 R26 R27 R28 R29 R30 R31 R32 R33 R34 R35 R36 R37 R38 R39 R41 R42 R43 R44 R45 R46 R47 R48 R49 R50 R51 R52 R53 R54 R55 R56 R57 R58 R59 R60 R61 R62 R63 R64 R65 R66 R67 R68 R69 R70 R71 R72 R73 R74 R75 R76 R77 R78 R79 R80 R81 R82 R83 R84 R85 R86 R87 R88 R89 R90 R91 R92 R93 R94 R95 R96 R97 R98 R99 R100 R101 R102 R103 R104 R105 R106 R107 R108 R109: library part R, "贴片电阻"
R40: library part RV09_RV0932
"RGB TFTLCD?": library part FPC-40, "FPC-40P-0.5mm"
RJ1: library part HR911130C, "RJ45 + MAG"
TP1 TP2: "测试点"
U7: library part ME6211C33, "LDO 3.3V/0.5A"
U11: "Micro SD卡"
U12: "千兆以太网PHY"
U18: library part LN6206P282MR-G
USB1: library part USB2.0_Type-A_F, "USB2.0_Type-A母座"
USBC1: library part USB2.0_Type-C_16Pin, "USB2.0_Type-C_16Pin母座"
X1 X2 X4: library part XTAL-4P, "4脚无源晶振(谐振器）"
X3: library part XTAL-ACT-4P, "4脚有源晶振(振荡器)"

## Via types
v1: diameter 17.7, hole 7.9, Top Layer to Bottom Layer, tented both sides, 445 vias
v2: diameter 17.7, hole 7.9, Top Layer to Bottom Layer, 12 vias

## Nets (pads, with @x,y where several pads share a name; then routed paths per layer and width w, separated by ;. In a path a pad name is that pad's centre, name@x,y a point inside that pad or via, vN(x,y) a via of type N, cw(c..) or ccw(c..) an arc to the next point about the centre after c; other vN are vias at no path point)
+1.5_ov: 17.2 18.2 IC1.10 U18.2 | length 593.1
  Top Layer w12: IC1.10@2360.22,316 2360.22,-65.76 v1(2415,-120.54)
  Bottom Layer w12: v1(2415,-120.54) 18.2@2493,-120.54 2495.16,-122.7 2495.16,-172.5 U18.2@2497.31,-174.66
+2.8_ov: 9.2 10.2 FB1.1 FB8.2 IC1.4 R74.1 U16.2 | length 1652
  Top Layer w12: v1(2298,-216) 2298.85,-216.85 2324.85,-216.85 v1(2346,-238) ; R74.1@2307,646.13 2308.97,646.13 2335.32,619.78 2389.5,619.78 2403.5,605.78 2412.71,605.78 FB1.1@2429.03,589.46 ; FB1.1@2431,589.46 2431,559 2494,496 2494,371.41 2478.42,355.83 2478.42,316.09 IC1.4@2478.33,316 2478.33,258.52 2479,257.85 v1(2479,231)
  Bottom Layer w12: 10.2@2164,-121.09 2164.77,-120.32 9.2@2223.23,-120.32 ; 9.2@2224,-119.54 9.2@2223.23,-120.32 ; v1(2298,-216) 2291.87,-222.13 2254.44,-222.13 2220.4,-188.09 U16.2@2220.4,-177.26 2222.2,-175.47 2222.2,-121.34 9.2@2223.23,-120.32 ; v1(2346,-238) 2403.08,-238 2422.3,-218.79 2513.79,-218.79 ; v1(2479,231) 2530,180 2530,164.76 2530.76,164 2530.76,122.25 2530,121.49 2530,-194.5 2513.79,-210.71 2513.79,-218.79 ; FB8.2@2519,-372.54 2520.97,-372.54 2547,-346.51 2547,-252 2513.79,-218.79
+3.3: U1.2 U2.12 U2.50 U3.57 | length 5061.1
  Top Layer w12: U3.57@-95.46,1923.74 -53.9,1923.74 -52.64,1925 v1(-24,1925) ; v1(652,2128) 652,2128.51 v1(676.3,2152.81) ; v2(1414,1193) 1414,1545 1580,1711 1580,1978 1740.5,2138.5 ; v1(1720,2154) 1725,2154 1740.5,2138.5 ; v1(1778,575) 1778,786.86 1821,829.86 v1(1821,1011) ; v1(1808,409) 1809.54,409 1815.1,414.56 U1.2@1855.47,414.56 ; 1832.38,1843.92 1854.39,1843.92 U2.50@1855.47,1845 1854.39,1846.08 1832.38,1846.08 1816,1862.45 1816,2063 1740.5,2138.5 ; U2.12@1836.31,1471 1829.86,1471 1822.83,1478.03 1822.83,1153.17 v1(1854,1122)
  Bottom Layer w12: v1(-24,1925) 75.97,2024.97 77.99,2024.97 181.01,2128 v1(652,2128) ; v1(676.3,2152.81) 677.49,2154 v1(1720,2154) ; v2(1414,1193) 1448.5,1158.5 1819.5,1158.5 1852.91,1125.09 1852.91,1124.63 1856.54,1121 v1@1856.63,1121 ; v1(1778,575) 1808,545 v1(1808,409) ; v1(1821,1011) 1821,1089 v1(1854,1122)
+3.3_AVDD_GMII: C46.2 C47.2 C48.2 FB7.1 U12.3 U12.14 | length 975.4
  Top Layer w12: v1(2047,1767) 2058.45,1778.45 2058.45,1822.55 2069.91,1834 2123,1834 v1(2134,1845) ; v1(2249.52,2070.34) 2250.07,2069.79 2250.07,2052.15 2249,2051.08 U12.14@2250.62,2049.46 ; U12.3@2323.46,1913.63 2323.77,1913.31 2382.69,1913.31 v1(2383,1913)
  Bottom Layer w12: FB7.1@2026.46,1797 2023.46,1794 2023.46,1764.5 ; C48.2@2028.47,1656.53 2028.47,1674.69 2020.13,1683.03 2020.13,1690.72 2020.46,1691.05 C46.2@2020.46,1732 2023.46,1735 2023.46,1764.5 ; v1(2047,1767) 2045.91,1765.91 2024.87,1765.91 2023.46,1764.5 ; v1(2134,1845) 2143.57,1854.57 2324.57,1854.57 v1(2383,1913) 2422.28,1952.28 2422.28,1991.04 2387.49,2025.83 2294.03,2025.83 v1(2249.52,2070.34)
+3.3_board: C4.2 C5.2 C11.1 C15.2 C16.2 C21.2 C22.2 C25.1 C26.2 C27.2 C36.2 C37.2 FB6.2 FB7.2 JP1.1 JP1.3 JP1.5 JP1.7 JP1.9 JP1.11 JP2.3 JP3.38 JP4.40 Q2.2 R14.2 R22.1 R24.1 R32.2 R36.2 R37.2 R38.2 R41.2 R42.2 R43.2 R44.2 R45.2 R46.2 R49.2 R55.2 R56.2 R57.2 R101.1 U7.5 U9.6 U10.3 U10.8 U10.12 U10.24 U10.39 U10.46 U11.4 U13.13 U14.7 U14.10 U15.7 U15.10 | length 3915.4
  Top Layer w12: v1(46,-139) 63,-156 U7.5@63,-173 ; v1(73.5,-162.5) U7.5@63,-173 ; v1(113.65,-275.37) 113.65,-251.5 ; v1(114.06,-100.06) 113.15,-100.98 C5.2@113.15,-153.87 113.65,-154.37 113.65,-186.87 ; v1(134.03,-251.5) 113.65,-251.5 ; v1(422.15,779.04) 427.1,784 427.1,833.84 U15.10@427.16,833.89 ; v1(481.03,780.04) 486.21,785.23 U15.7@486.21,833.89 ; v1(547.07,329) 547.07,327.46 558.53,316 U13.13@558.53,246 ; v1(558,775) 560.47,777.47 U14.10@560.47,835.89 ; U14.7@619.53,835.89 619.53,784.54 v1(623.53,780.54) ; v1(893,555) 893.15,554.85 U10.12@950.43,554.85 ; U10.8@950.43,633.59 979.38,633.59 983.56,637.76 986.78,637.76 1001.61,652.6 1001.61,751.02 ; U10.3@950.43,732.02 979.38,732.02 983.55,736.18 986.78,736.18 1001.61,751.02 ; C4.2@952.54,876 994.68,876 1010.93,892.25 v1(1012.48,892.25) ; R22.1@985.91,1018 985.19,1017.27 985.19,955.73 R24.1@984.46,955 984.46,920.27 v1(1012.48,892.25) ; U10.39@1178.78,822.57 1178.78,793.62 1174.6,789.44 1174.6,786.22 1159.77,771.39 ; v1(1222.5,-228) 1264.72,-185.78 U11.4@1264.72,-121.32 ; R14.2@1340,980.54 1341.97,980.54 1377,945.51 1377,819 1419,777 1422.18,777 1447,752.18 1447,724.43 1409.54,686.97 R32.2@1409.54,685 1409.54,683.03 1366.84,640.33 ; v1(1373.93,633.24) 1366.84,640.33 ; v1(1771,-348) R49.2@1771,-346.46 ; U7.5@63,-173 65.81,-175.81 65.81,-180.81 67.81,-180.81 73.87,-186.87 113.65,-186.87 ; 113.65,-251.5 113.65,-231.12 113.65,-213.87 113.65,-186.87 ; 1001.61,751.02 1021.98,771.39 ; v1(1012.48,892.25) 1040.49,864.23 1040.49,823.05 U10.46@1040.98,822.57 1040.49,822.08 1040.49,789.9 1021.98,771.39 ; 1021.98,771.39 1159.77,771.39 ; 1159.77,771.39 1218.15,713 U10.24@1218.15,503.67 1287.67,503.67 1325,541 1325,598.49 1366.84,640.33
  Bottom Layer w12: v1(-211,-65.87) -127.13,-65.87 -77,-116 39.56,-116 55.5,-100.06 v1(114.06,-100.06) ; C27.2@421.65,778.54 v1(422.15,779.04) 480.03,779.04 C26.2@480.53,779.54 v1(481.03,780.04) 593.03,780.04 C37.2@593.53,780.54 v1(623.53,780.54) C36.2@653.53,780.54 ; C25.1@545.98,331 545.53,330.54 v1(547.07,329) ; v1(581,2378) 585,2382 656.46,2382 C11.1@658,2383.54 707.54,2383.54 Q2.2@716,2392 ; v1(1012.48,892.25) 1030.23,910 v1(1106.4,910) ; R57.2@1049,-285.09 R36.2@1166.64,-285.09 ; C21.2@1101,-344.46 C22.2@1160,-344.46 1162.33,-342.12 1162.33,-289.39 R36.2@1166.64,-285.09 ; R46.2@1396,-285.09 R55.2@1338.17,-285.09 R56.2@1280.33,-285.09 1278.36,-285.09 1233.23,-239.95 1233.23,-236.76 1224.47,-228 v1(1222.5,-228) 1220.53,-228 1175.4,-273.13 1175.4,-276.32 R36.2@1166.64,-285.09 ; R101.1@2069.6,-474 v1(2072.02,-474) ; v1(2083,1797) FB7.2@2083.54,1797
  other v1: 48,-191 96.89,-186.87 73,-186 48,-166 95,-164 72,-139 96,-138 -225,2696 -373,2702.46 -369,2956.46 -224,2957.46 -79,2959.46
+3.3_DVDD_GMII: C43.1 C44.1 C45.1 FB6.1 R77.1 R79.1 R82.1 R96.2 R100.1 R103.2 R105.2 R106.2 R109.1 U12.8 U12.27 | length 2873.6
  Top Layer w12: FB6.1@2026.46,1802 2025.96,1801.5 2025.96,1732.5 C43.1@2025.46,1732 2025.46,1678.17 C44.1@2013.28,1666 2017.13,1662.16 2025.69,1662.16 2028.87,1658.97 2028.87,1652.02 2034.73,1646.16 2062.7,1646.16 2070.81,1654.26 2070.81,1659.93 2078.91,1668.04 2078.91,1683.63 v1(2080,1684.72) ; v1(2041,2165) 2047,2171 R82.1@2069.27,2171 2081.19,2159.08 2081.19,2148.81 R96.2@2102,2128 ; v1(2047.69,1962.39) 2048.73,1961.34 2079.72,1961.34 2109.88,1931.19 2128.73,1931.19 U12.27@2130.54,1929.38 ; U12.8@2323.46,1992.37 2325.27,1994.18 2341.38,1994.18 v1@2347.24,2000.04 ; v1(2353.24,2004.69) 2379,2030.45 2379,2070 v1(2405,2096)
  Bottom Layer w12: R109.1@2031.53,1856.5 2022.79,1847.76 1961.76,1847.76 1959,1845 1926,1845 ; v1(2041,2165) 1984,2108 1984,2071.51 1971.82,2071.51 1919,2018.68 1919,1975 1952.5,1941.5 R105.2@1991.71,1941.5 ; v1(2047.69,1962.39) 2016.52,1962.39 2015.72,1963.19 ; v1(2080,1684.72) 2101,1663.72 2101,1631 2077.55,1607.55 2049.39,1607.55 2033.12,1623.82 2032.18,1623.82 2004.55,1651.45 2004.55,1664.78 1984.7,1684.63 1984.7,1757.36 1967.1,1774.96 1933.83,1774.96 1926,1782.79 1926,1845 ; R79.1@2274,1776.27 R77.1@2320,1776.27 2358,1738.27 2358,1707 2385,1680 2402.5,1680 2415,1692.5 2415,1768.14 v1(2408.87,1774.27) 2488.27,1774.27 2530.95,1816.95 2530.95,2012.05 2447,2096 v1(2405,2096) ; v1(2353.24,2004.69) 2285.54,2004.69 2238.81,2051.43 2126.23,2051.43 2100.81,2026.01 2100.81,2010.12 2082.45,2010.12 2078.98,2006.66 2057.19,2006.66 2050.16,1999.63 2050.16,1997.62 R106.2@2036.53,1984 2015.72,1963.19 ; 1926,1845 1916,1855 1916,1886 1928,1898 1990.96,1898 R103.2@1991.96,1899 1991.96,1900.72 1989.84,1902.84 1989.84,1939.64 R105.2@1991.71,1941.5 ; R105.2@1991.71,1941.5 2004.03,1953.83 2004.03,1954.19 2011.19,1961.34 2013.88,1961.34 2015.72,1963.19
+3.3_hdmi: C1.1 C2.2 C12.2 C13.2 Q2.3 R1.2 R2.2 R3.2 R4.2 R5.2 R6.2 R7.2 R8.2 R9.2 R10.2 R17.1 R18.1 R21.1 R27.1 R30.1 U5.5 U6.5 | length 2936.3
  Top Layer w12: v1(1019.4,2453.4) 1063.8,2409 v1(1211,2409)
  Bottom Layer w12: R18.1@581.79,2667 581.79,2668.97 606.82,2694 1005.46,2694 1030.72,2668.73 1032.69,2668.73 1041.46,2659.97 R10.2@1041.46,2658 1041.46,2656.03 1032.69,2647.27 1031.94,2647.27 974.4,2589.73 974.4,2565.45 980.26,2559.59 984.81,2559.59 992.4,2552 U5.5@994.4,2552 996.4,2552 1003.99,2544.41 1033.69,2544.41 1042.46,2535.65 C1.1@1042.46,2534 1038.69,2530.23 1038.69,2499.27 U6.5@992.82,2453.4 ; Q2.3@796,2355 803,2355 815,2343 815,2322.03 837.03,2300 C12.2@839,2300 839.77,2300.77 898,2300.77 987.77,2300.77 1027,2340 1027,2413.22 1000.82,2439.4 1000.82,2445.4 U6.5@992.82,2453.4 ; C2.2@927.54,2455 928.34,2454.2 986.02,2454.2 U6.5@986.82,2453.4 U6.5@992.82,2453.4 ; v1(1019.4,2453.4) U6.5@992.82,2453.4 ; v1(1211,2409) 1212.09,2410.09 1555.09,2410.09 R1.2@1557,2412 1557,2577 1468,2666 1468,2802.46 R21.1@1461,2809.46 ; R9.2@1248.69,2783.46 1338.84,2783.46 1364.84,2809.46 R21.1@1461,2809.46 ; 1581.66,2763 1549.81,2794.85 1549.12,2794.85 R17.1@1533.97,2810 ; R30.1@1666,2999.54 1665.73,2999.81 1602.27,2999.81 R27.1@1602,3000.09 1600.03,3000.09 1567,2967.06 1567,2843.03 R17.1@1533.97,2810 ; R21.1@1461,2809.46 1461.27,2809.73 1531.73,2809.73 R17.1@1532,2810 R17.1@1533.97,2810
+3.3_ov: FB3.1 FB4.2 FB5.2 R75.2 R83.2 R84.2 R85.2 R101.2 | length 1546.6
  Top Layer w12: v1(2472,-16) 2569,-16 2589,4 2589,57.21 v1(2562.09,84.13)
  Bottom Layer w12: R101.2@2144.4,-474 2144.4,-468.09 2176.6,-435.89 2178.19,-435.89 2207,-407.08 2207,-382.31 2202.62,-377.93 2200.65,-377.93 2196.27,-382.31 2196.27,-384.28 2181.73,-398.81 2181.73,-401.24 2174.7,-408.27 2068.3,-408.27 2061.27,-401.24 2061.27,-220.22 2086.03,-195.46 FB4.2@2088,-195.46 2088,-104 2136,-56 2136,-46.36 2152.36,-30 2227.51,-30 2263.54,6.03 FB3.1@2263.54,8 ; R84.2@2264.54,68 2264.04,67.5 2264.04,30 2297.91,30 2306.41,38.5 2355.8,38.5 R83.2@2394.46,77.16 ; R75.2@2336.46,229 2336.46,139.09 2394.46,81.09 R83.2@2394.46,79.13 R83.2@2394.46,77.16 ; v1(2472,-16) 2460.61,-4.61 2429.18,-4.61 2423.32,1.25 2423.32,48.29 R83.2@2394.46,77.16